# Altium PCB sEMG-20130713.PCBDOC
Units mil, origin at the board's own origin, x right, y up, seen from the top; angles counter-clockwise.
Board outline 6000 x 4000 mil, 4 copper layers (Top Layer, GND, POWER, Bottom Layer); 241 components, 116 nets, 607 pads, 173 vias.
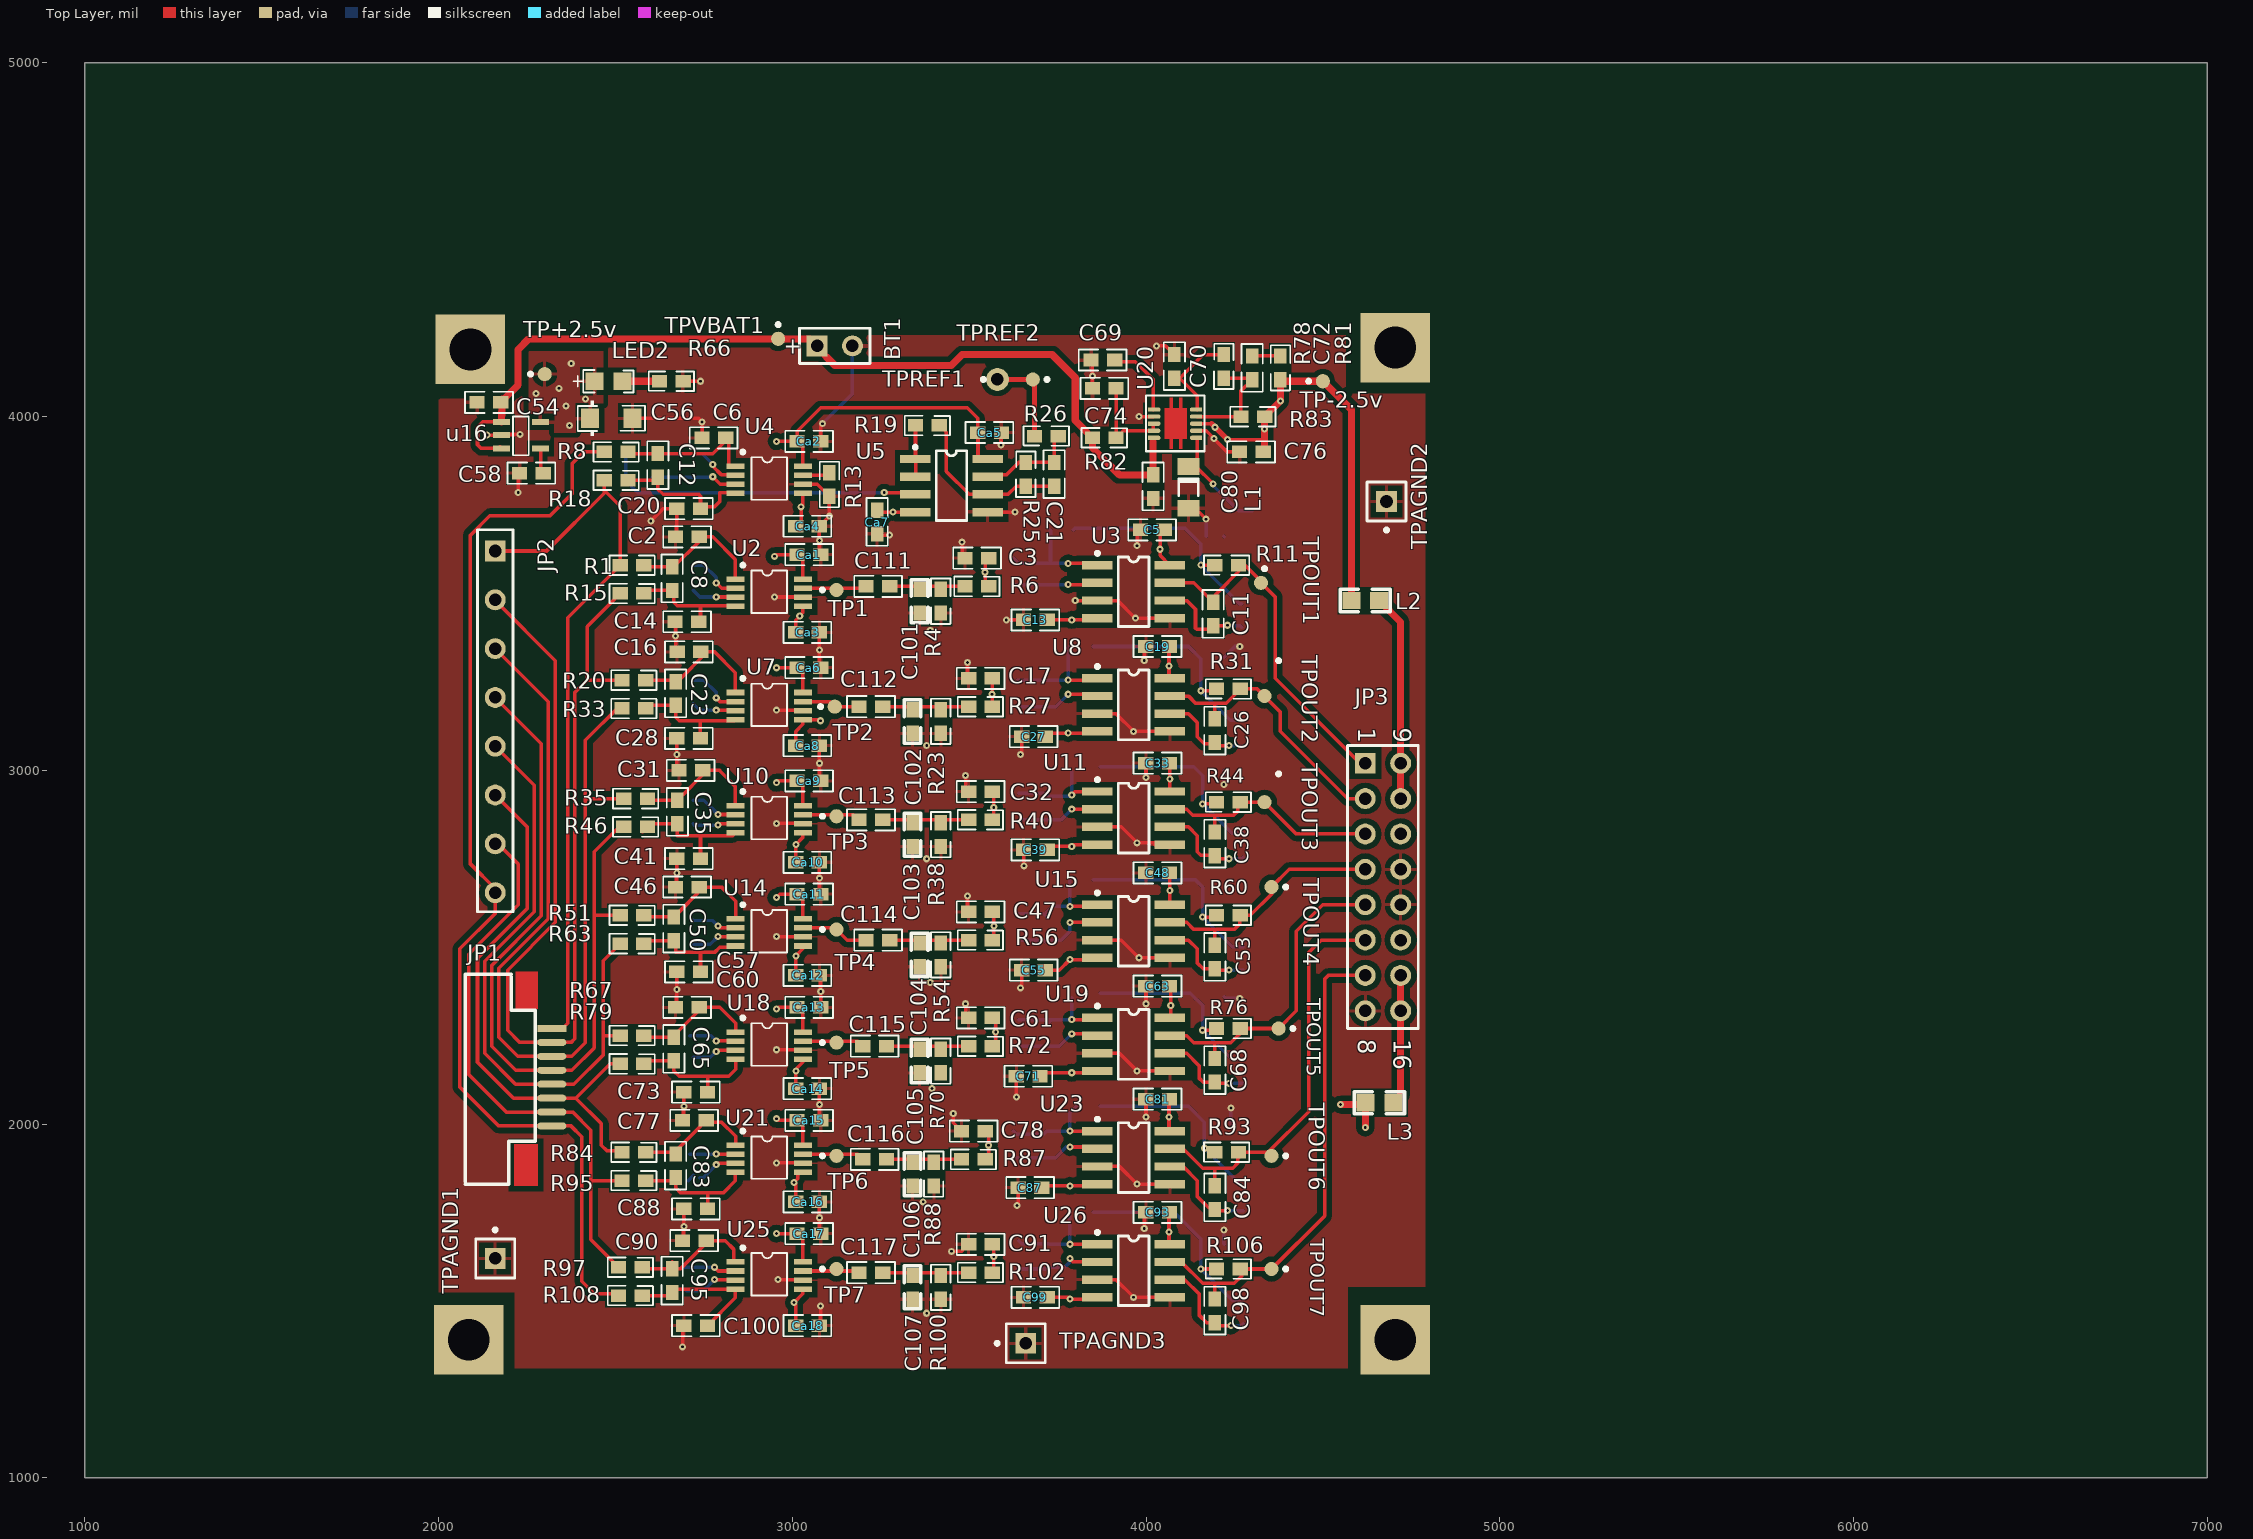
[diagram p0: Top Layer view]
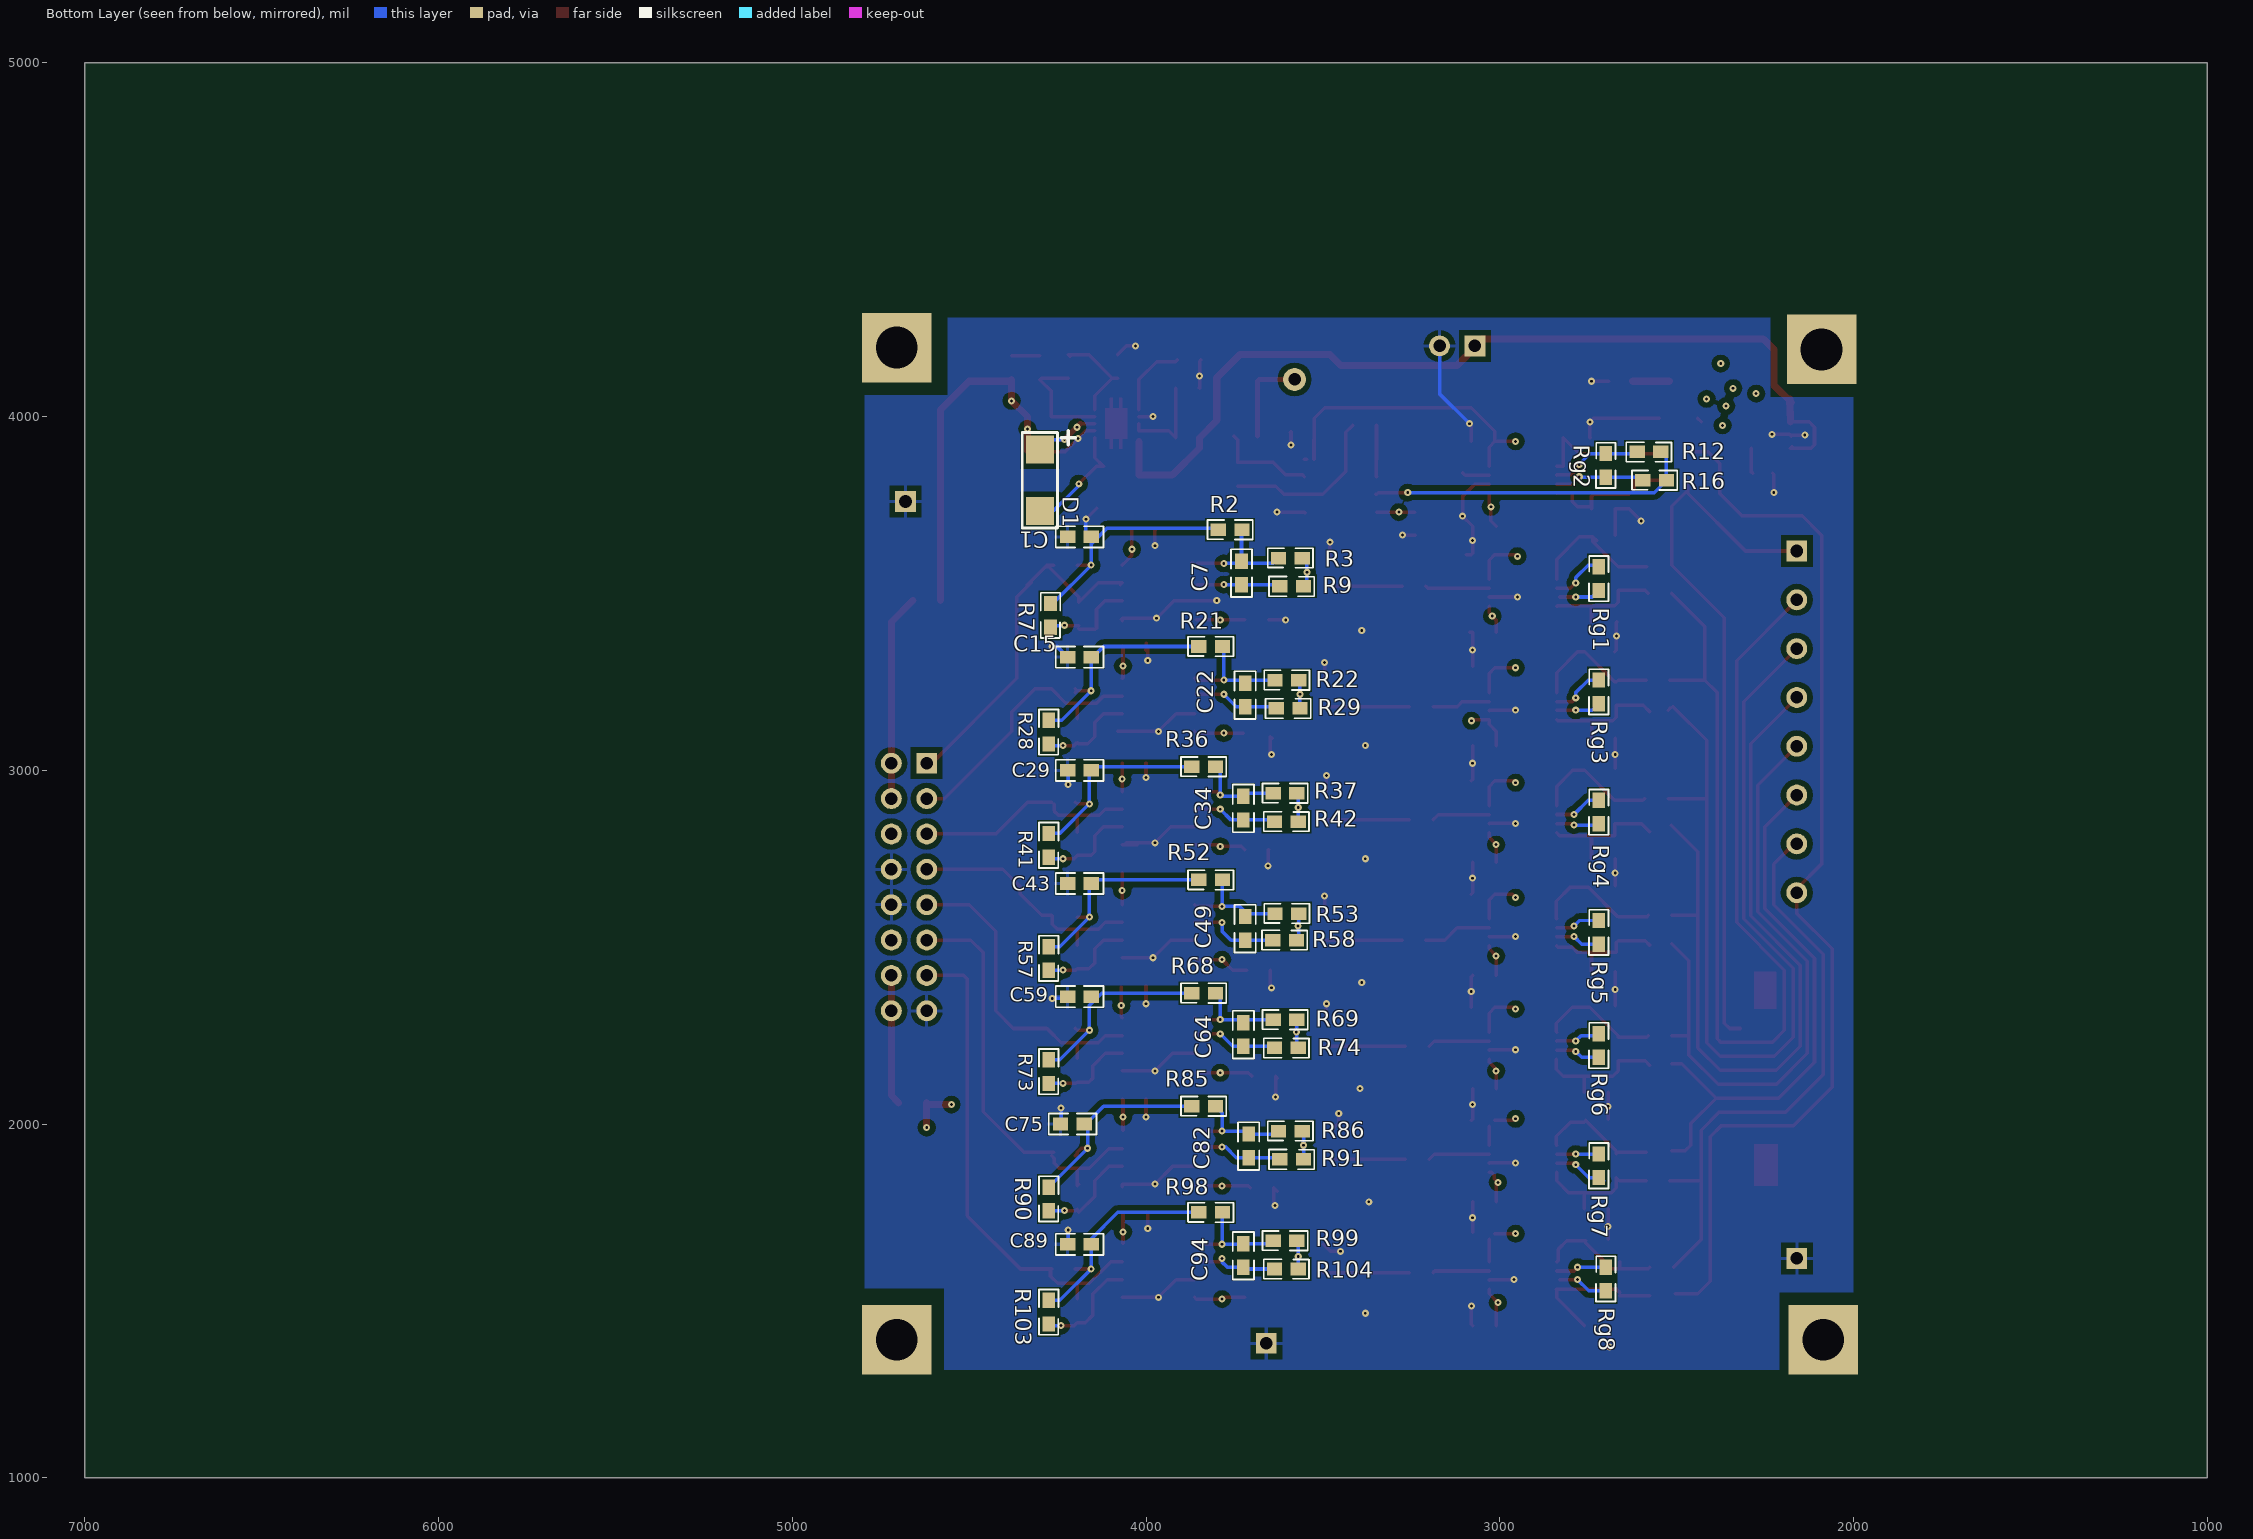
[diagram p1: Bottom Layer view, seen from below]
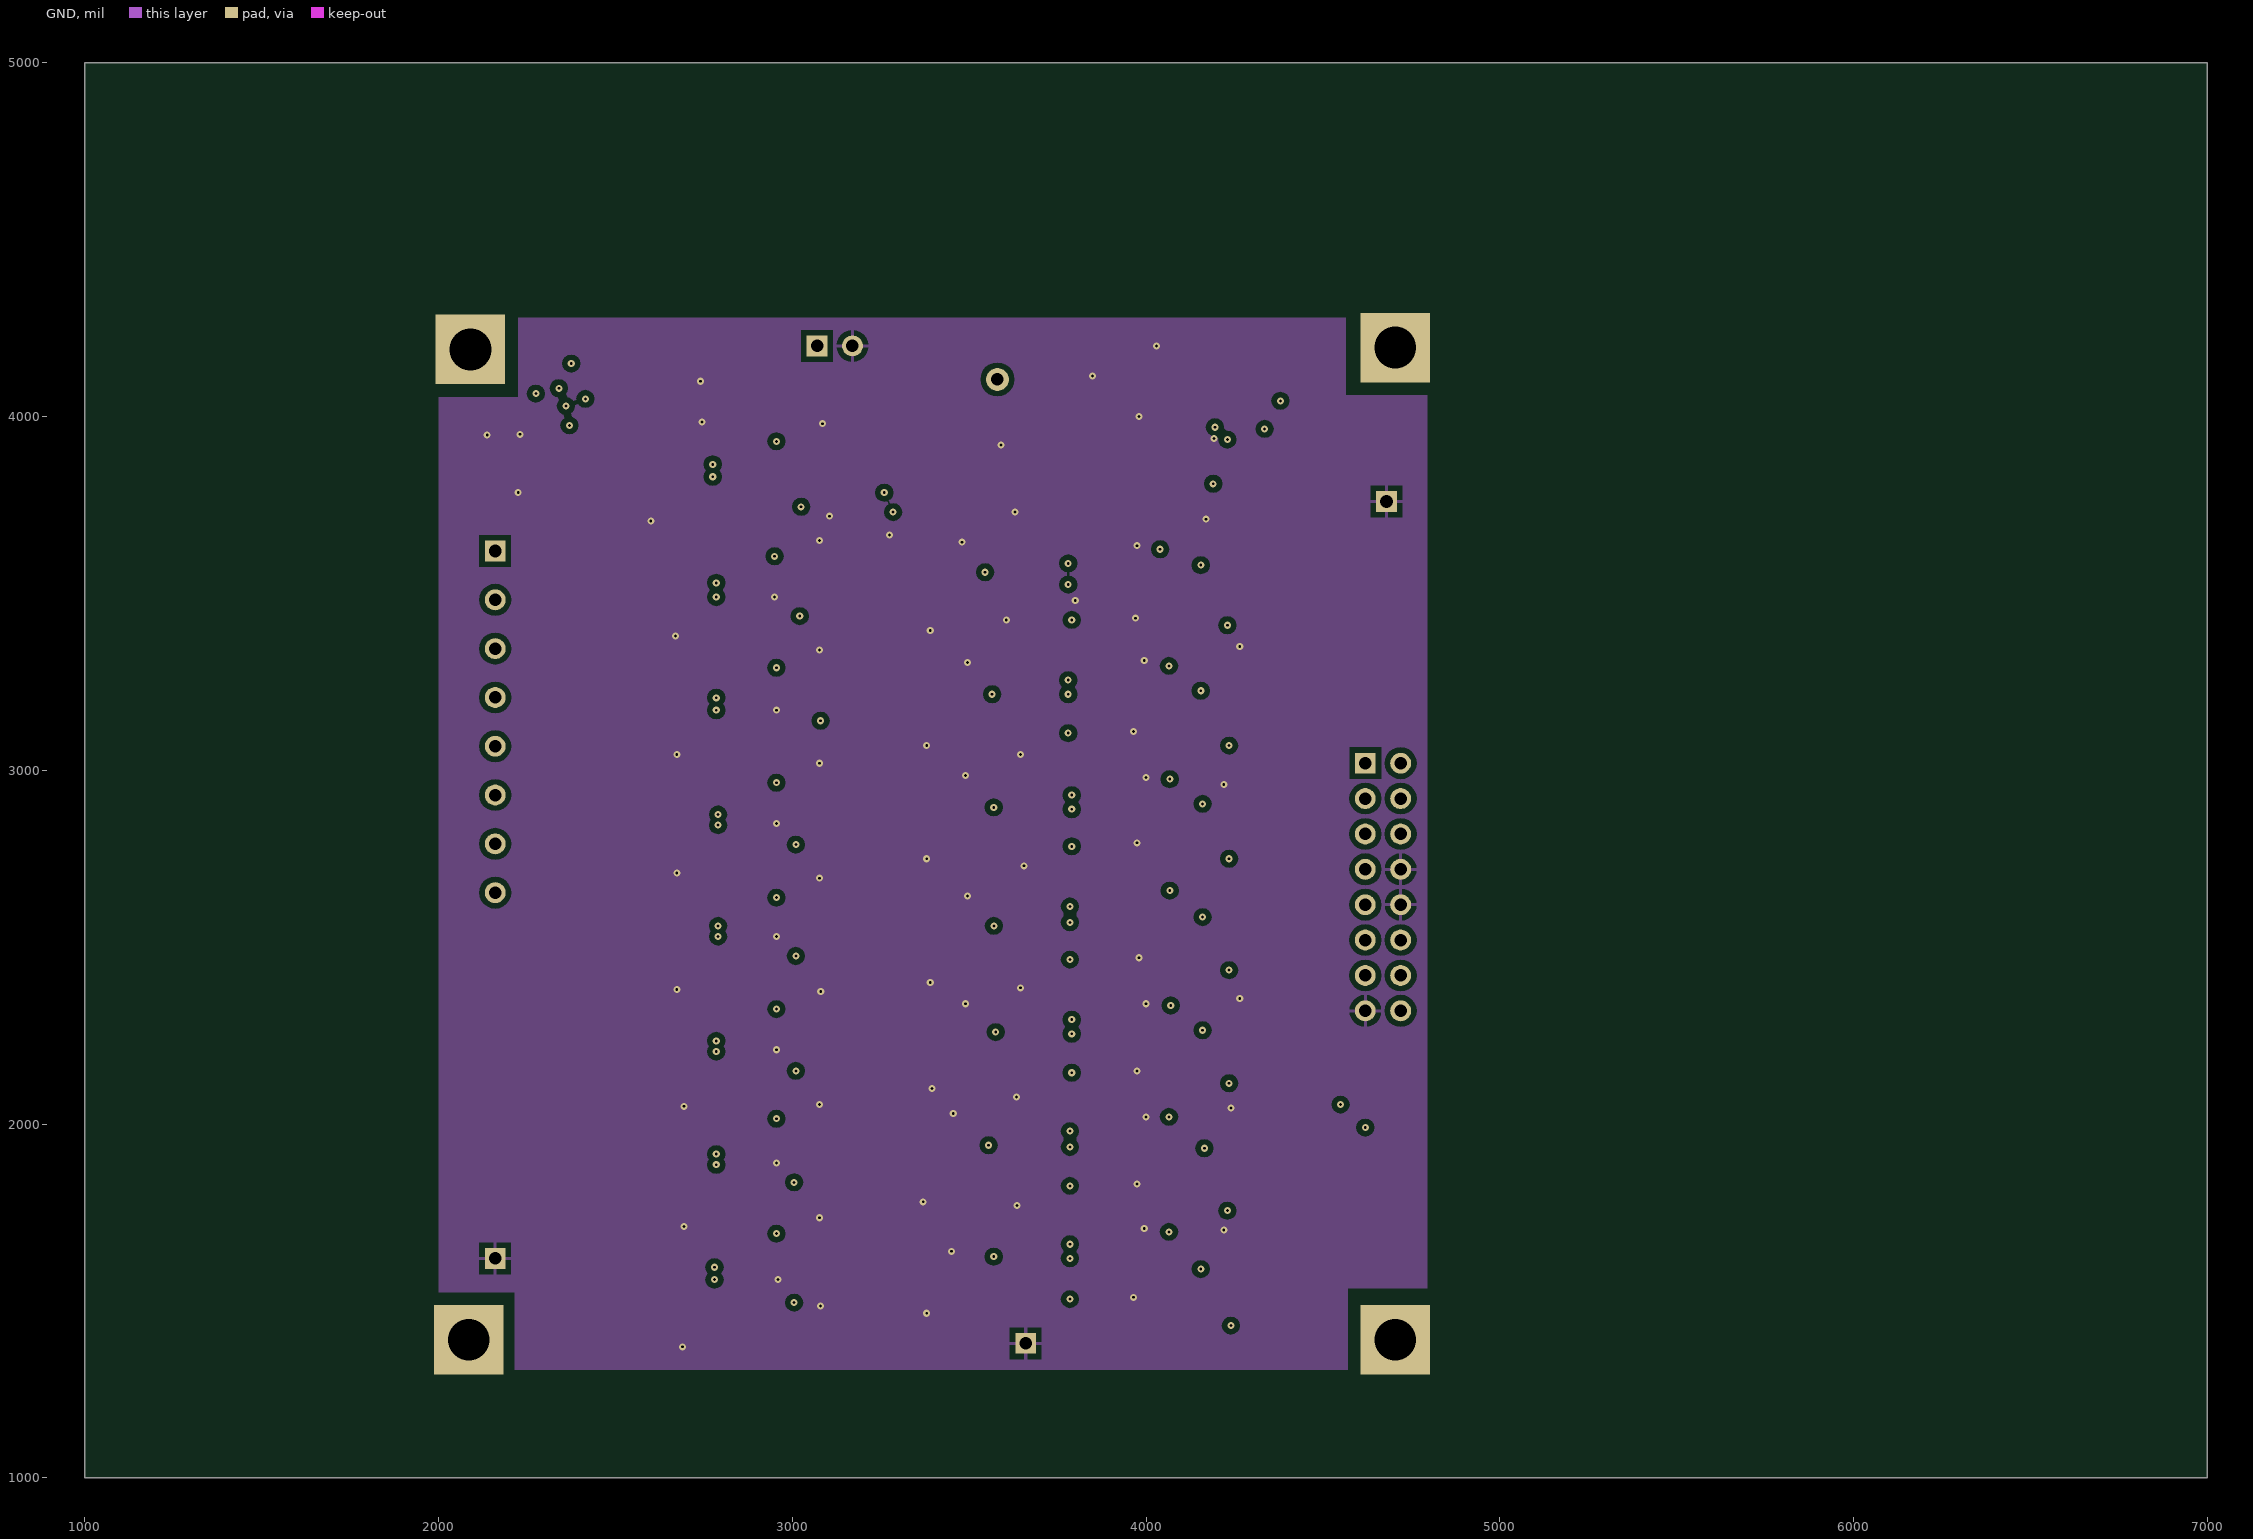
[diagram p2: GND]
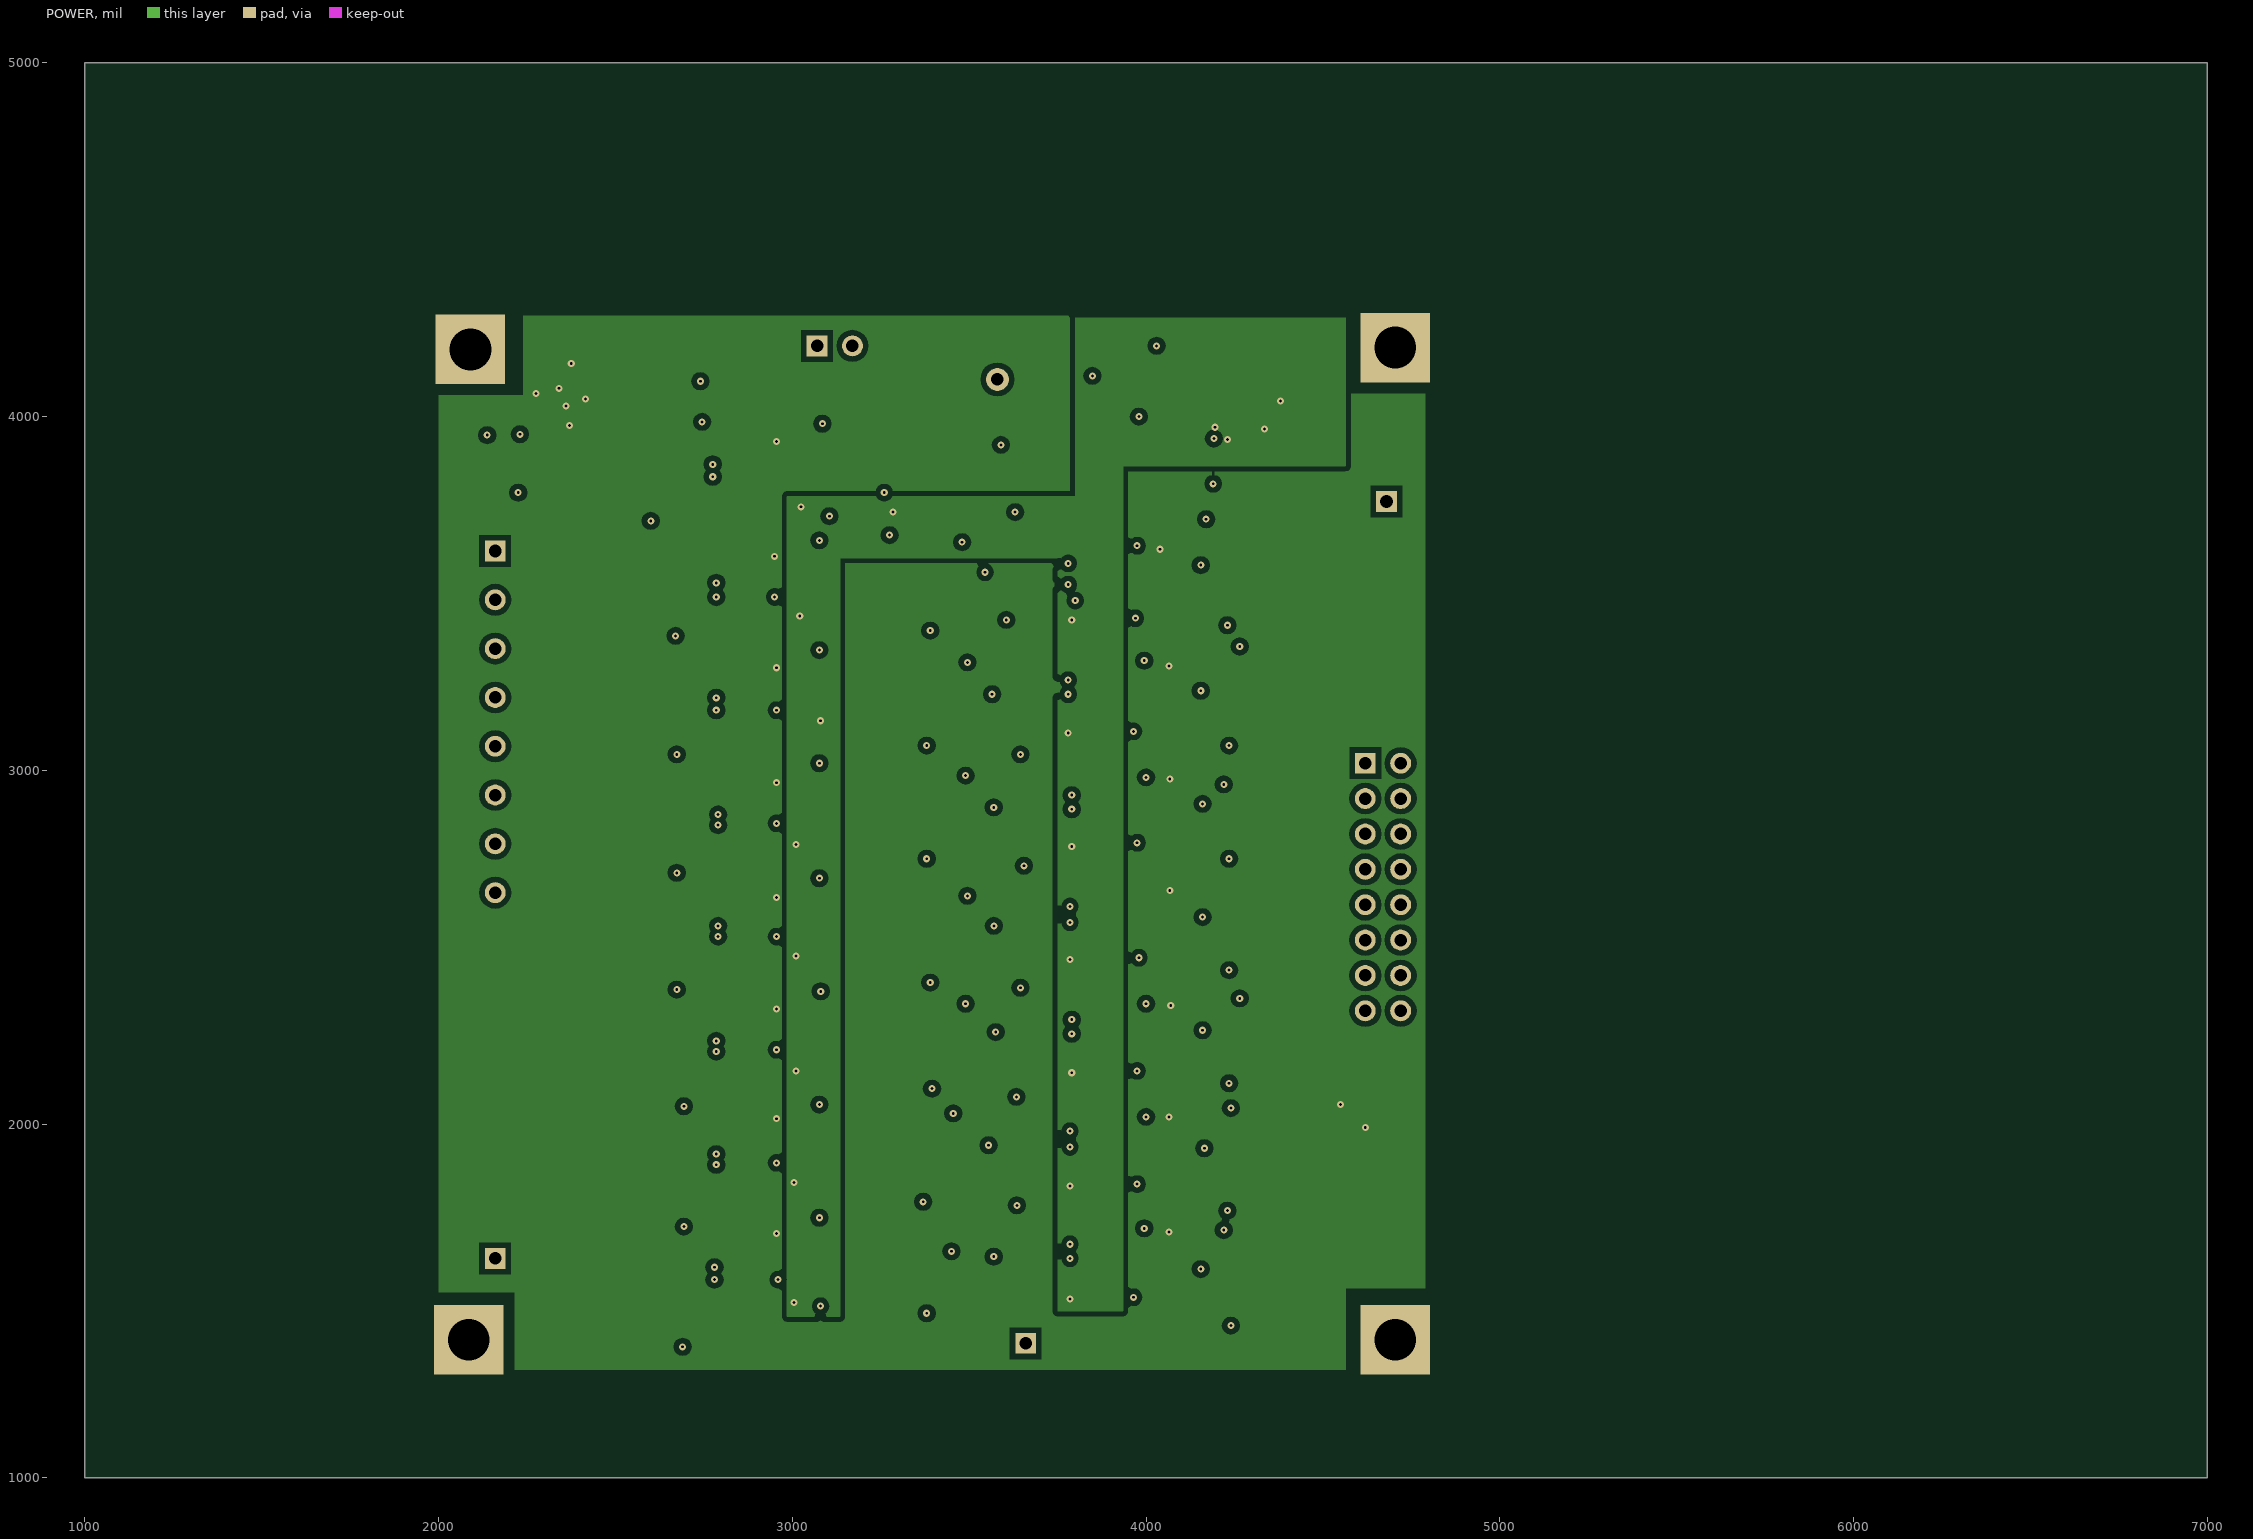
[diagram p3: POWER]

## Layer stack, top to bottom
Top Layer: signal copper 1.4
Dielectric: core 12.6, FR-4, Dk 4.8
GND: signal copper 1.4
Dielectric: prepreg 12.6, FR-4, Dk 4.8
POWER: signal copper 1.4
Dielectric: core 12.6, FR-4, Dk 4.8
Bottom Layer: signal copper 1.4

## Board outline
1000,1000 7000,1000 7000,5000 1000,5000

## Design rules (kind name [scope] priority, off if disabled: settings)
Clearance [All] p1: gap=7
ComponentClearance [All] p1: gap=10 collisioncheckmode=3 verticalgap=10
PolygonConnect [All] p1: connectstyle=Relief reliefconductorwidth=10 reliefentries=4 polygonreliefangle="90 Angle"
RoutingVias [All] p1: holewidth=28 width=50 viastyle="Through Hole" minholewidth=28 minwidth=50 maxholewidth=28 maxwidth=50
SolderMaskExpansion [All] p1: expansion=4
TestPointUsage [All] p1: valid=0 allowmultiple=FALSE
Testpoint [All] p1: side=15 testpointundercomponent=TRUE minsize=40 maxsize=100 preferedsize=60 minholesize=0 maxholesize=40 preferedholesize=32 testpointgrid=1 style=1021 order=0123456789
Width [All] p1: maxlimit=100 minlimit=7 preferedwidth=10 toplayer_prefwidth=20 midlayer1_minwidth=10 midlayer1_maxwidth=10 midlayer2_minwidth=10 midlayer2_maxwidth=10 minimp=50.000000 maximp=50.000000 favimp=50.000000
17 further rules are at their usual default settings.

## Components (designator, comment, footprint, x,y, rotation, side; value= is the part's Value field where it differs from the comment)
BT1 "Battery" BAT-2 3120,4200 r0 top
C1 "43uF" CAP0603 4090,3660 r0 bottom
C2 "2.2pF" CAP0603 2605,3660 r0 top
C3 "1.8uF" CAP0603 3620,3600 r180 top
C5 "0.1uF" CAP0603 3920,3680 r0 top
C6 "2.2pF" CAP0603 2680,3940 r0 top
C7 "100nF" CAP0603 3730,3460 r90 bottom
C8 "10pF" CAP0603 2660,3640 r270 top
C11 "100nF" CAP0603 4190,3540 r270 top
C12 "10pF" CAP0603 2620,3960 r270 top
C13 "0.1uF" CAP0603 3785,3425 r180 top
C14 "2.2pF" CAP0603 2800,3420 r180 top
C15 "43uF" CAP0603 4090,3320 r0 bottom
C16 "2.2pF" CAP0603 2610,3335 r0 top
C17 "1.8uF" CAP0603 3630,3260 r180 top
C19 "0.1uF" CAP0603 3935,3350 r0 top
C20 "2.2pF" CAP0603 2805,3740 r180 top
C21 "68pF" CAP0603 3740,3935 r270 top
C22 "100nF" CAP0603 3720,3115 r90 bottom
C23 "10pF" CAP0603 2670,3315 r270 top
C26 "100nF" CAP0603 4195,3210 r270 top
C27 "0.1uF" CAP0603 3780,3095 r180 top
C28 "2.2pF" CAP0603 2805,3090 r180 top
C29 "43uF" CAP0603 4090,3000 r0 bottom
C31 "2.2pF" CAP0603 2615,3000 r0 top
C32 "1.8uF" CAP0603 3630,2940 r180 top
C33 "0.1uF" CAP0603 3935,3020 r0 top
C34 "100nF" CAP0603 3725,2795 r90 bottom
C35 "10pF" CAP0603 2675,2980 r270 top
C38 "100nF" CAP0603 4195,2890 r270 top
C39 "0.1uF" CAP0603 3785,2775 r180 top
C41 "2.2pF" CAP0603 2805,2750 r180 top
C43 "43uF" CAP0603 4090,2680 r0 bottom
C46 "2.2pF" CAP0603 2605,2670 r0 top
C47 "1.8uF" CAP0603 3630,2600 r180 top
C48 "0.1uF" CAP0603 3935,2710 r0 top
C49 "100nF" CAP0603 3720,2455 r90 bottom
C50 "10pF" CAP0603 2665,2650 r270 top
C53 "100nF" CAP0603 4195,2570 r270 top
C54 "0.1uF" CAP0603 2240,4040 r180 top
C55 "0.1uF" CAP0603 3780,2435 r180 top
C56 "10uF" CAP-A 2500,4000 r180 top
C57 "2.2pF" CAP0603 2805,2430 r180 top
C58 "0.1uF" CAP0603 2360,3840 r180 top
C59 "43uF" CAP0603 4090,2360 r0 bottom
C60 "2.2pF" CAP0603 2605,2330 r0 top
C61 "1.8uF" CAP0603 3630,2300 r180 top
C63 "0.1uF" CAP0603 3935,2390 r0 top
C64 "100nF" CAP0603 3725,2155 r90 bottom
C65 "10pF" CAP0603 2665,2310 r270 top
C68 "100nF" CAP0603 4195,2250 r270 top
C69 "4.7nF" CAP0603 3780,4160 r0 top
C70 "0.22uF" CAP0603 4080,4240 r270 top
C71 "0.1uF" CAP0603 3765,2135 r180 top
C72 "10pF" CAP0603 4300,4040 r90 top
C73 "2.2pF" CAP0603 2825,2090 r180 top
C74 "0.1uF" CAP0603 3980,4080 r180 top
C75 "43uF" CAP0603 4110,2000 r0 bottom
C76 "22uF" CAP0603 4200,3900 r0 top
C77 "2.2pF" CAP0603 2625,2010 r0 top
C78 "1.8uF" CAP0603 3610,1980 r180 top
C80 "10uF" CAP0603 4020,3900 r270 top
C81 "0.1uF" CAP0603 3935,2070 r0 top
C82 "100nF" CAP0603 3710,1840 r90 bottom
C83 "10pF" CAP0603 2670,1980 r270 top
C84 "100nF" CAP0603 4195,1890 r270 top
C87 "0.1uF" CAP0603 3770,1820 r180 top
C88 "2.2pF" CAP0603 2825,1760 r180 top
C89 "43uF" CAP0603 4090,1660 r0 bottom
C90 "2.2pF" CAP0603 2625,1670 r0 top
C91 "1.8uF" CAP0603 3630,1660 r180 top
C93 "0.1uF" CAP0603 3935,1750 r0 top
C94 "100nF" CAP0603 3725,1530 r90 bottom
C95 "10pF" CAP0603 2660,1655 r270 top
C98 "100nF" CAP0603 4195,1570 r270 top
C99 "0.1uF" CAP0603 3785,1510 r180 top
C100 "2.2pF" CAP0603 2825,1430 r180 top
C101 "Cap" 0603 3360,3480 r90 top
C102 "Cap" 0603 3340,3140 r90 top
C103 "Cap" 0603 3340,2820 r90 top
C104 "Cap" 0603 3360,2480 r90 top
C105 "Cap" 0603 3360,2180 r90 top
C106 "Cap" 0603 3340,1860 r90 top
C107 "Cap" 0603 3340,1540 r90 top
C111 "2.2uF" CAP0603 3340,3520 r180 top
C112 "2.2uF" CAP0603 3320,3180 r180 top
C113 "2.2uF" CAP0603 3320,2860 r180 top
C114 "2.2uF" CAP0603 3340,2520 r180 top
C115 "2.2uF" CAP0603 3135,2220 r0 top
C116 "2.2uF" CAP0603 3135,1900 r0 top
C117 "2.2uF" CAP0603 3320,1580 r180 top
Ca1 "0.1uF" CAP0603 3145,3610 r180 top
Ca2 "0.1uF" CAP0603 3145,3930 r180 top
Ca3 "0.1uF" CAP0603 2945,3390 r0 top
Ca4 "0.1uF" CAP0603 2945,3690 r0 top
Ca5 "Cap" CAP0603 3460,3955 r0 top
Ca6 "0.1uF" CAP0603 3145,3290 r180 top
Ca7 "Cap" CAP0603 3240,3800 r270 top
Ca8 "0.1uF" CAP0603 2945,3070 r0 top
Ca9 "0.1uF" CAP0603 3145,2970 r180 top
Ca10 "0.1uF" CAP0603 2945,2740 r0 top
Ca11 "0.1uF" CAP0603 3145,2650 r180 top
Ca12 "0.1uF" CAP0603 2945,2420 r0 top
Ca13 "0.1uF" CAP0603 3145,2330 r180 top
Ca14 "0.1uF" CAP0603 2945,2100 r0 top
Ca15 "0.1uF" CAP0603 3145,2010 r180 top
Ca16 "0.1uF" CAP0603 2945,1780 r0 top
Ca17 "0.1uF" CAP0603 3145,1690 r180 top
Ca18 "0.1uF" CAP0603 2945,1430 r0 top
D1 "SL02（小信号肖特基二极管）" Diode_NOMAL 4300,3820 r270 bottom
JP1 "自制电极" 电极焊盘 2185,2130 r0 top
JP2 "已有电极" 接线端子1*8 2160,3120 r180 top
JP3 "" HDR2X8_CEN 4620,3020 r270 top
L1 "Inductor" INDC3216-1206 4120,3800 r270 top
L2 "bean" 0805 4620,3480 r180 top
L3 "bean" 0805 4660,2060 r180 top
LED2 "Green" LED0805 2480,4100 r180 top
R1 "Res2" RES0603 2545,3580 r180 top
R2 "Res2" RES0603 3760,3680 r180 bottom
R3 "Res2" RES0603 3590,3600 r180 bottom
R4 "Res2" RES0603 3420,3480 r90 top
R6 "Res2" RES0603 3520,3520 r180 top
R7 "Res2" RES0603 4270,3440 r90 bottom
R8 "Res2" RES0603 2500,3900 r180 top
R9 "Res2" RES0603 3590,3520 r0 bottom
R11 "Res2" RES0603 4230,3580 r0 top
R12 "Res2" RES0603 2580,3900 r0 bottom
R13 "Res2" RES0603 3105,3810 r90 top
R15 "Res2" RES0603 2545,3500 r180 top
R16 "Res2" RES0603 2560,3820 r180 bottom
R18 "Res2" RES0603 2500,3820 r180 top
R19 "Res2" RES0603 3380,3975 r180 top
R20 "Res2" RES0603 2550,3255 r180 top
R21 "Res2" RES0603 3815,3350 r180 bottom
R22 "Res2" RES0603 3600,3255 r180 bottom
R23 "Res2" RES0603 3420,3140 r90 top
R25 "Res2" RES0603 3660,3835 r270 top
R26 "Res2" RES0603 3720,3945 r0 top
R27 "Res2" RES0603 3530,3180 r180 top
R28 "Res2" RES0603 4275,3110 r90 bottom
R29 "Res2" RES0603 3600,3175 r0 bottom
R31 "Res2" RES0603 4235,3230 r0 top
R33 "Res2" RES0603 2550,3175 r180 top
R35 "Res2" RES0603 2555,2920 r180 top
R36 "Res2" RES0603 3835,3010 r180 bottom
R37 "Res2" RES0603 3605,2935 r180 bottom
R38 "Res2" RES0603 3420,2820 r90 top
R40 "Res2" RES0603 3530,2860 r180 top
R41 "Res2" RES0603 4275,2790 r90 bottom
R42 "Res2" RES0603 3605,2855 r0 bottom
R44 "Res2" RES0603 4235,2910 r0 top
R46 "Res2" RES0603 2555,2840 r180 top
R51 "Res2" RES0603 2545,2590 r180 top
R52 "Res2" RES0603 3815,2690 r180 bottom
R53 "Res2" RES0603 3600,2595 r180 bottom
R54 "Res2" RES0603 3420,2480 r90 top
R56 "Res2" RES0603 3530,2520 r180 top
R57 "Res2" RES0603 4275,2470 r90 bottom
R58 "Res2" RES0603 3610,2520 r0 bottom
R60 "Res2" RES0603 4235,2590 r0 top
R63 "Res2" RES0603 2545,2510 r180 top
R66 "Res2" RES0603 2660,4100 r0 top
R67 "Res2" RES0603 2545,2250 r180 top
R68 "Res2" RES0603 3835,2370 r180 bottom
R69 "Res2" RES0603 3605,2295 r180 bottom
R70 "Res2" RES0603 3420,2180 r90 top
R72 "Res2" RES0603 3530,2220 r180 top
R73 "Res2" RES0603 4275,2150 r90 bottom
R74 "Res2" RES0603 3605,2215 r0 bottom
R76 "Res2" RES0603 4235,2270 r0 top
R78 "Res2" RES0603 4220,4140 r270 top
R79 "Res2" RES0603 2545,2170 r180 top
R81 "Res2" RES0603 4380,4140 r90 top
R82 "Res2" RES0603 3880,3940 r180 top
R83 "Res2" RES0603 4300,4000 r180 top
R84 "Res2" RES0603 2550,1920 r180 top
R85 "Res2" RES0603 3835,2050 r180 bottom
R86 "Res2" RES0603 3590,1980 r180 bottom
R87 "Res2" RES0603 3510,1900 r180 top
R88 "Res2" RES0603 3400,1860 r90 top
R90 "Res2" RES0603 4275,1790 r90 bottom
R91 "Res2" RES0603 3590,1900 r0 bottom
R93 "Res2" RES0603 4230,1920 r0 top
R95 "Res2" RES0603 2550,1840 r180 top
R97 "Res2" RES0603 2540,1595 r180 top
R98 "Res2" RES0603 3815,1750 r180 bottom
R99 "Res2" RES0603 3605,1670 r180 bottom
R100 "Res2" RES0603 3420,1540 r90 top
R102 "Res2" RES0603 3530,1580 r180 top
R103 "Res2" RES0603 4275,1470 r90 bottom
R104 "Res2" RES0603 3605,1590 r0 bottom
R106 "Res2" RES0603 4235,1590 r0 top
R108 "Res2" RES0603 2540,1515 r180 top
Rg1 "Res2" RES0603 2720,3540 r270 bottom
Rg2 "Res2" RES0603 2700,3860 r270 bottom
Rg3 "Res2" RES0603 2720,3220 r270 bottom
Rg4 "Res2" RES0603 2720,2880 r270 bottom
Rg5 "Res2" RES0603 2720,2540 r270 bottom
Rg6 "Res2" RES0603 2720,2220 r270 bottom
Rg7 "Res2" RES0603 2720,1880 r270 bottom
Rg8 "Res2" RES0603 2700,1560 r270 bottom
TP1 "Component_1" TP0#1 3125,3510 r90 top
TP2 "Component_1" TP0#1 3120,3180 r90 top
TP3 "Component_1" TP0#1 3125,2870 r90 top
TP4 "Component_1" TP0#1 3125,2550 r90 top locked
TP5 "Component_1" TP0#1 3125,2230 r90 top
TP6 "Component_1" TP0#1 3125,1910 r90 top
TP7 "Component_1" TP0#1 3125,1590 r90 top
TP+2.5v "+2.5v" TP0#1 2300,4120 r90 top
TP-2.5v "-2.5v" TP0#1 4500,4100 r90 top
TPAGND1 "Component_1" PIN1 2160,1620 r0 top
TPAGND2 "Component_1" PIN1 4680,3760 r180 top
TPAGND3 "Component_1" PIN1 3660,1380 r90 top
TPOUT1 "Component_1" TP0#2 4335,3530 r0 top locked
TPOUT2 "Component_1" TP0#3 4335,3310 r270 top locked
TPOUT3 "Component_1" TP0#4 4335,2990 r270 top locked
TPOUT4 "Component_1" TP0#1 4355,2670 r270 top
TPOUT5 "Component_1" TP0#1 4375,2270 r270 top
TPOUT6 "Component_1" TP0#1 4355,1910 r270 top
TPOUT7 "Component_1" TP0#1 4355,1590 r270 top
TPREF1 "Component_1" 通孔测试点 3580,4105 r90 top
TPREF2 "Component_1" TP0#1 3680,4105 r270 top
TPVBAT1 "Component_1" TP1 2960,4220 r0 top
U2 "AD8220" MSOP-8 2945,3510 r270 top
U3 "OPA2365" SOIC-8#1 3965,3505 r270 top (schematic designator U9)
U4 "AD8220" MSOP-8 2945,3830 r270 top (schematic designator U1)
U5 "OP2177" SOIC-8#2 3410,4540 r270 top (schematic designator U23)
U7 "AD8220" MSOP-8 2945,3190 r270 top (schematic designator U3)
U8 "OPA2365" SOIC-8#1 3965,3185 r270 top (schematic designator U10)
U10 "AD8220" MSOP-8 2945,2870 r270 top (schematic designator U4)
U11 "OPA2365" SOIC-8#1 3965,2865 r270 top
U14 "AD8220" MSOP-8 2945,2550 r270 top (schematic designator U5)
U15 "OPA2365" SOIC-8#1 3965,2545 r270 top (schematic designator U12)
u16 "SPX3819_2.5v" SOT-23-G5 2225,3950 r0 top (schematic designator U25)
U18 "AD8220" MSOP-8 2945,2230 r270 top (schematic designator U6)
U19 "OPA2365" SOIC-8#1 3965,2225 r270 top (schematic designator U13)
U20 "tps63700" QFN10 4020,3940 r90 top
U21 "AD8220" MSOP-8 2945,1910 r270 top (schematic designator U7)
U23 "OPA2365" SOIC-8#1 3965,1905 r270 top (schematic designator U14)
U25 "AD8220" MSOP-8 2945,1580 r270 top (schematic designator U8)
U26 "OPA2365" SOIC-8#1 3965,1585 r270 top (schematic designator U15)

## Footprints (in the part's own frame and the unit in brackets; to place one, negate y for a bottom-side part, rotate by r counter-clockwise, add the part's x,y. Pads: shape width x height; smd on the part's side, far side on the other; paste and mask are expansions set on the pad)
0603 [mm]
  rect 1.1x0.9 smd: 1(-0.9,0) 2(0.8,0)
  silkscreen extent -1.6,-0.6 1.5,0.6
0805 [mm]
  rect 1.3x1.25 smd: 1(-1,0) 2(1,0)
  silkscreen extent -1.8,-0.8 1.8,0.8
BAT-2 [mm] "Multicell Battery; 2 Leads"
  rect 1.5x1.5 hole 0.9: 1(-1.27,0)
  round 1.5 hole 0.9: 2(1.27,0)
  silkscreen extent -2.54,-1.27 2.54,1.27
CAP0603 [mm]
  rect 1.1x0.9 smd: 1(1.64,0) 2(3.34,0)
  silkscreen extent 0.76,-0.76 4.19,0.76
CAP-A [mm]
  rect 1.3x1.4 smd: 1(1.814,0.127) 2(-1.234,0.127)
  silkscreen extent -2.12,-1.14 2.7,1.4
Diode_NOMAL [mm]
  rect 2x2 smd: 1(-2.2,-0.002) 2(2.2,-0.002)
  silkscreen extent -3.56,-1.27 3.43,2.54
HDR2X8_CEN [mm] "Connector; Header; 8x2 Position"
  rect 1.5x1.5 hole 0.9: 1(0,0)
  round 1.5 hole 0.9: 2(2.54,0) 3(5.08,0) 4(7.62,0) 5(10.16,0) 6(12.7,0) 7(15.24,0) 8(17.78,0) 9(0,2.54) 10(2.54,2.54) 11(5.08,2.54) 12(7.62,2.54) 13(10.16,2.54) 14(12.7,2.54) 15(15.24,2.54) 16(17.78,2.54)
  silkscreen extent -1.27,-1.27 19.05,3.81
INDC3216-1206 [mm] "3216 Chip; Chip Inductor; Body 3.2 x 1.6 mm (LxW typ)"
  rect 1.2x1.6 smd: 1(-1.5,0) 2(1.5,0)
  silkscreen extent -0.6,-0.7 0.6,0.7
LED0805 [mm]
  rect 1.3x1.25 smd: 1(1,0) 2(-1,0)
  silkscreen extent -1.8,-0.8 2.5,0.8
MSOP-8 [mm]
  rect 0.4x1.3 smd: 1(-0.762,-2.688) 2(-0.112,-2.688) 3(0.538,-2.688) 4(1.188,-2.688) 5(1.188,2.159) 6(0.538,2.159) 7(-0.112,2.159) 8(-0.762,2.159)
  silkscreen extent -1.9,-2.28 1.65,1.02
PIN1 [mm] "Connector; Plug"
  rect 1.5x1.5 hole 0.9: 1(0,0)
  silkscreen extent -1.4,-1.4 1.4,2.17
QFN10 [mil]
  round 11.98 smd mask+0: 1(80,-15) 2(60,-15) 3(40,-15) 4(20,-15) 5(0,-15) 6(0,-110) 7(20,-110) 8(40,-110) 9(60,-110) 10(80,-110)
  rect 12x28 smd mask+0: 1(80,0) 2(60,0) 3(40,0) 4(20,0) 5(0,0) 6(0,-125) 7(20,-125) 8(40,-125) 9(60,-125) 10(80,-125)
  Top Layer region: 78.5,-83 114,-83 114,-74 78.5,-74
  Top Layer region: -31.5,-83 5,-83 5,-74 -31.5,-74
  Top Layer region: -4,-96 84,-96 84,-32 -4,-32
  Top Layer region: 83,-56 114,-56 114,-47 83,-47
  Top Layer region: -31.5,-56 5,-56 5,-47 -31.5,-47
  silkscreen extent -38,-145 120,20
RES0603 [mm]
  rect 1.1x0.9 smd: 1(-0.9,0) 2(0.8,0)
  silkscreen extent -1.68,-0.7 1.58,0.7
SOIC-8#1 [mm]
  rect 0.6x2.2 smd: 1(-1.905,-2.6) 2(-0.635,-2.6) 3(0.635,-2.6) 4(1.905,-2.6) 5(1.905,2.6) 6(0.635,2.6) 7(-0.635,2.6) 8(-1.905,2.6)
  silkscreen extent -2.88,-2.72 2.5,1.1
SOIC-8#2 [mm]
  rect 0.6x2.2 smd: 1(16.764,-1.584) 2(18.034,-1.584) 3(19.304,-1.584) 4(20.574,-1.584) 5(20.574,3.616) 6(19.304,3.616) 7(18.034,3.616) 8(16.764,3.616)
  silkscreen extent 15.79,-1.71 21.17,2.12
SOT-23-G5 [mil]
  rect 47.24x16.9 smd: 1(-47,35) 2(-47,-2.4) 3(-47,-39.8) 4(63.24,-39.8) 5(63.24,35)
  silkscreen extent -15,-59 30,50
TP0#1 [mil]
  round 40 smd: 0(0,0)
  silkscreen extent -5,35 5,45
TP0#2 [mil]
  round 40 smd: 0(-10,0)
  silkscreen extent -5,35 5,45
TP0#3 [mil]
  round 40 smd: 0(100,0)
  silkscreen extent -5,35 5,45
TP0#4 [mil]
  round 40 smd: 0(80,0)
  silkscreen extent -5,35 5,45
TP1 [mil]
  round 40 smd: 1(0,0)
  silkscreen extent -5,35 5,45
接线端子1*8 [mm]
  rect 1.5x1.5 hole 0.9: 1(0,-12.7)
  round 1.5 hole 0.9: 2(0,-9.195) 3(0,-5.69) 4(0,-2.184) 5(0,1.321) 6(0,4.826) 7(0,8.331) 8(0,11.836)
  silkscreen extent -1.27,-14.22 1.27,13.21
电极焊盘 [mil]
  rect 82.11x19.68 smd: 1(135,140)
  oval 82.11x19.68 smd: 2(135,100.63) 3(135,61.26) 4(135,21.89) 5(135,-17.48) 6(135,-56.85) 7(135,-96.22) 8(135,-135.59)
  Top Layer region: 32.64,301.41 32.64,195.11 95.63,195.11 95.63,301.41
  Top Layer region: 28.74,-186.95 28.74,-305.06 95.67,-305.06 95.67,-186.95
  silkscreen extent -109,-301 88,294
通孔测试点 [mil]
  round 65 hole 35.44 unplated: 0(0,0)
  silkscreen extent -5,35 5,45

## Part data
BT1: "Multicell Battery"
C1 C2 C3 C5 C6 C7 C8 C11 C12 C13 C14 C15 C16 C17 C19 C20 C21 C22 C23 C26 C27 C28 C29 C31 C32 C33 C34 C35 C38 C39 C41 C43 C46 C47 C48 C49 C50 C53 C54 C55 C57 C58 C59 C60 C61 C63 C64 C65 C68 C69 C70 C71 C72 C73 C74 C75 C76 C77 C78 C80 C81 C82 C83 C84 C87 C88 C89 C90 C91 C93 C94 C95 C98 C99 C100 C111 C112 C113 C114 C115 C116 C117 Ca1 Ca2 Ca3 Ca4 Ca6 Ca8 Ca9 Ca10 Ca11 Ca12 Ca13 Ca14 Ca15 Ca16 Ca17 Ca18: library part CAP
C56: library part "CAP POL3"
C101 C102 C103 C104 C105 C106 C107 Ca5 Ca7: "Capacitor"
D1: library part Diode, "Default Diode"
JP1 JP2: library part "Header 8", "Header, 8-Pin"
JP3: library part "Header 8X2A", "Header, 8-Pin, Dual row"
L2 L3: library part Res2, "Resistor"
LED2: library part LED
R1 R2 R3 R4 R6 R7 R8 R9 R11 R12 R13 R15 R16 R18 R19 R20 R21 R22 R23 R25 R26 R27 R28 R29 R31 R33 R35 R36 R37 R38 R40 R41 R42 R44 R46 R51 R52 R53 R54 R56 R57 R58 R60 R63 R66 R67 R68 R69 R70 R72 R73 R74 R76 R78 R79 R81 R82 R83 R84 R85 R86 R87 R88 R90 R91 R93 R95 R97 R98 R99 R100 R102 R103 R104 R106 R108 Rg1 Rg2 Rg3 Rg4 Rg5 Rg6 Rg7 Rg8: "Resistor"
TP+2.5v TP-2.5v U2 U4 U7 U10 U14 U18 U20 U21 U25: library part Component_1
u16: library part SPX3819

## Free pads (board coordinates)
  rect 196.85x196.85 hole 118.11: 0(4705,4195) 1(2090,4190) 2(2085,1390) 3(4705,1390)

## Via types
v1: diameter 20, hole 8, Top Layer to Bottom Layer, 173 vias

## Nets (pads, with @x,y where several pads share a name; then routed paths per layer and width w, separated by ;. In a path a pad name is that pad's centre, name@x,y a point inside that pad or via, vN(x,y) a via of type N, cw(c..) or ccw(c..) an arc to the next point about the centre after c; other vN are vias at no path point)
+2.5V: C5.2 C19.2 C33.2 C48.2 C56.1 C63.2 C81.2 C93.2 Ca1.2 Ca2.2 Ca5.1 Ca6.2 Ca9.2 Ca11.2 Ca13.2 Ca15.2 Ca17.2 L3.2 LED2.1 TP+2.5v.0 U2.8 U3.8 U4.8 U5.8 U7.8 U8.8 U10.8 U11.8 U14.8 U15.8 u16.5 U18.8 U19.8 U21.8 U23.8 U25.8 U26.8 | length 2558.6
  Top Layer w10: C56.1@2430,3985 C56.1@2440.63,3995.63 ; v1(2950,3605) 2955,3610 Ca1.2 3030,3593.5 U2.8 ; v1(2955,1690) Ca17.2 ; v1(2955,2015) 2960,2010 Ca15.2 ; v1(2955,2325) 2960,2330 Ca13.2 3030,2313.5 U18.8 ; v1(2955,2640) 2965,2650 Ca11.2 3030,2633.5 U14.8 ; v1(2955,2965) 2960,2970 Ca9.2 3030,2953.5 U10.8 ; v1(2955,3290) Ca6.2 3030,3273.5 U7.8 ; v1(2955,3930) Ca2.2 ; U25.8 Ca17.2@3030,1673.5 ; U21.8 Ca15.2@3030,1993.5 ; U4.8 3030,3913.5 Ca2.2 ; U5.8@3525,3880 3524.57,3995.43 3495,4025 3080,4025 3013.5,3958.5 Ca2.2 ; U5.8@3545,3880 U5.8 ; C5.2@4041.5,3680 4040,3678.5 4040,3607.36 U3.8 ; U26.8@4065,1662.36 v1(4065,1695) C93.2@4065,1748.5 ; U23.8@4065,1982.36 v1(4065,2020) 4065,2068.5 C81.2 ; U3.8@4065,3582.36 U3.8 ; C48.2 4067.36,2709.13 U15.8 ; C33.2 4067.36,3019.13 U11.8 ; U8.8@4066.5,3260.87 U8.8 4065,3262.36 v1(4065,3295) 4065,3348.5 C19.2 ; U3.8@4066.5,3580.87 U3.8 ; U19.8 4070,2302.64 v1(4070,2335) C63.2@4070,2386.5
  Top Layer w20: v1(4550,2055) L3.2@4615.63,2055 ; v1(4620,1990) 4620,2059.37 L3.2
  other v1: 4067.36,2660 4067.36,2975 4040,3625 2370,3975 2360,4030 2415,4050 2275,4065 2340,4080 2375,4150
-2.5V: C13.1 C27.1 C39.1 C55.1 C71.1 C76.2 C87.1 C99.1 Ca3.1 Ca4.1 Ca7.1 Ca8.1 Ca10.1 Ca12.1 Ca14.1 Ca16.1 Ca18.1 D1.1 L2.2 R81.1 R83.1 TP-2.5v.0 U2.5 U3.4 U4.5 U5.4 U7.5 U8.4 U10.5 U11.4 U14.5 U15.4 U18.5 U19.4 U20.8 U21.5 U23.4 U25.5 U26.4 | length 3474
  Top Layer w10: v1(3005,1495) 3030,1520 U25.5 ; Ca18.1 v1@3009.57,1490.43 ; Ca16.1 3009.57,1830.43 v1(3005,1835) 3015,1845 3015,1855 3023.23,1863.23 U21.5 ; Ca14.1 3010,2100.43 3010,2155 3030,2175 U18.5 ; Ca12.1 3010,2420.43 v1(3010,2475) 3030,2495 U14.5 ; Ca10.1 3010,2740.43 v1(3010,2790) 3030,2810 U10.5 ; Ca8.1 3009.57,3109.57 3030,3130 U7.5 3076.77,3143.23 v1(3080,3140) ; Ca3.1 3009.57,3424.57 3030,3445 U2.5 ; Ca4.1 3025,3705.43 v1(3025,3745) 3030,3750 U4.5 ; Ca7.1@3240.43,3730 3335,3730 U5.4 ; C71.1 3710.43,2145 v1(3790,2145) U19.4@3857.64,2145 ; C87.1 3710.43,1825 v1(3785,1825) U23.4@3857.64,1825 ; C55.1 3755,2435 v1(3785,2465) 3857.64,2465 U15.4 ; C99.1 3780,1510 v1(3785,1505) 3857.64,1505 U26.4 ; C39.1 3730.43,2785 v1(3790,2785) 3795,2790 U11.4 ; C13.1 v1(3790,3425) U3.4@3857.64,3425 ; C27.1@3725.43,3105 v1(3780,3105) 3857.64,3105 U8.4 ; U20.8@4145,3980 4185,3980 ; v1(4230,3935) 4335.43,3935 ; C76.2 4335.43,3903.94 R83.1 v1(4380,4044.57) R81.1 4380.43,4105 4415,4105
  Top Layer w15: 4185,3980 v1(4230,3935)
  Top Layer w20: C76.2@4335.43,3903.94 R83.1 v1(4380,4044.57) R81.1 4384.57,4100 TP-2.5v.0 4580.63,4019.37 L2.2
  Bottom Layer w10: v1(4230,3935) D1.1@4285,3935
  other v1: 3010,2150 3021,3436 3285,3730 4335.43,3965 4195,3970
AGND: BT1.2 C1.2 C2.1 C3.2 C5.1 C6.1 C13.2 C14.2 C15.2 C16.1 C17.2 C19.1 C20.2 C27.2 C28.2 C29.2 C31.1 C32.2 C33.1 C39.2 C41.2 C43.2 C46.1 C47.2 C48.1 C54.2 C55.2 C56.2 C57.2 C58.2 C59.2 C60.1 C61.2 C63.1 C69.1 C70.1 C71.2 C73.2 C74.2 C75.2 C76.1 C77.1 C78.2 C80.2 C81.1 C87.2 C88.2 C89.2 C90.1 C91.2 C93.1 C99.2 C100.2 C101.1 C102.1 C103.1 C104.1 C105.1 C106.1 C107.1 Ca1.1 Ca2.1 Ca3.2 Ca4.2 Ca5.2 Ca6.1 Ca7.2 Ca8.2 Ca9.1 Ca10.2 Ca11.1 Ca12.2 Ca13.1 Ca14.2 Ca15.1 Ca16.2 Ca17.1 Ca18.2 JP3.8 JP3.12 JP3.13 L1.2 R4.1 R13.1 R23.1 R38.1 R54.1 R66.2 R88.1 R100.1 TPAGND1.1 TPAGND2.1 TPAGND3.1 U2.6 U3.3 U3.5 U4.6 U5.5 U7.6 U8.3 U8.5 U10.6 U11.3 U11.5 U14.6 U15.3 U15.5 u16.2 U18.6 U19.3 U19.5 U20.2 U20.7 U21.6 U23.3 U23.5 U25.6 U26.3 U26.5 | length 6392.1
  Top Layer w10: v1(2137.4,3947.6) u16.2 ; u16.2@2175.4,3945 2180.4,3950 v1(2230,3950) ; v1(2225,3785) 2225,3836.5 C58.2 ; C56.2 2735,3995 v1(2745,3985) 2745,3940.43 C6.1 ; v1(2600,3705) 2635,3740 C20.2 C2.1@2673.5,3663.94 ; C14.2 2670,3418.5 2670,3339.57 C16.1 ; C60.1@2673.5,2333.94 C57.2 ; C46.1@2673.5,2673.94 C41.2 ; C31.1@2673.5,3006.06 C28.2 ; v1(2690,1370) 2690,1426.5 C100.2 ; R66.2 v1(2740,4100) ; C90.1@2693.5,1673.94 C88.2 ; C77.1@2693.5,2013.94 C73.2 ; v1(2950,3490) 3028.82,3490 U2.6 ; v1(2955,1890) 3028.82,1890 U21.6 ; v1(2955,2210) 3028.82,2210 U18.6 ; v1(2955,2530) 3028.82,2530 U14.6 ; v1(2955,2850) 3028.82,2850 U10.6 ; v1(2955,3170) 3028.82,3170 U7.6 ; v1(2960,1560) 3028.82,1560 U25.6 ; U4.6 3070.75,3808.82 R13.1 v1(3105,3718.5) Ca4.2 3076.5,3613.94 Ca1.1 Ca1.1@3095,3610 ; Ca18.2 3080,1433.5 v1(3080,1485) ; Ca17.1@3076.5,1693.94 Ca16.2 ; Ca14.2 3076.5,2013.94 Ca15.1 ; Ca12.2 3080.43,2416.06 Ca13.1 ; Ca10.2 3076.5,2653.94 Ca11.1 ; Ca8.2 3076.5,2973.94 Ca9.1 ; Ca6.1@3076.5,3293.94 Ca3.2 Ca3.2@3085,3390 ; Ca2.1 3080.43,3975.43 v1(3085,3980) ; Ca7.2@3238.5,3665 v1(3275,3665) ; v1(3450,1640) 3478.5,1640 C91.2 ; v1(3455,2030) 3455,2003.5 C78.2 ; C3.2@3478.5,3600 3480,3601.5 v1(3480,3645) ; C61.2@3490,2305 v1(3490,2340) ; C32.2@3490,2940 v1(3490,2985) ; v1(3495,2645) 3495,2603.5 C47.2 ; v1(3495,3305) 3495,3263.5 C17.2 ; U5.5@3550,3727.64 U5.5 v1(3630,3730) ; v1(3590,3920) 3590,3953.5 Ca5.2 Ca5.2@3590,3956.5 ; v1(3605,3425) C13.2 ; C87.2@3628.5,1810 C87.2 v1@3638.5,1773.5 ; C71.2@3628.5,2130 C71.2 v1(3633.5,2076.5) ; C27.2@3643.5,3090 C27.2 3648.5,3048.5 v1(3645,3045) ; v1@3648.5,2388.5 C55.2 ; C39.2 3655,2773.5 v1(3655,2730) ; v1(3800,3480) 3920,3480 v1(3970,3430) U3.5 ; C69.1@3845,4160.43 C69.1 3848.5,4156.06 C74.2 C74.2@3850,4081.5 ; U15.3@3860,2520 3930,2520 v1(3980,2470) U15.5 ; U26.3 3915,1560 v1(3965,1510) U26.5 ; U23.3 3925,1880 v1(3975,1830) U23.5 U23.5@4067.36,1822.64 ; U19.3 3925,2200 v1(3975,2150) U19.5 ; U11.3 3930,2840 v1(3975,2795) 4055,2795 U11.5@4060,2790 ; U8.3 3915,3160 v1(3965,3110) U8.5@4080,3110 ; C5.1@3974.57,3680 3975,3679.57 v1(3975,3635) ; v1(3980,4000) U20.2@4020,4000 ; v1(3995,1705) 3995,1745.43 C93.1 ; v1(3995,3310) 3995,3345.43 C19.1 ; C81.1 4000,2069.57 v1(4000,2020) ; C63.1 4000,2389.57 v1(4000,2340) ; C19.1@3999.57,3359.57 3999.57,3340 C19.1@4000,3340.43 ; v1(4000,2980) 4000,3019.57 C33.1 C33.1@4000,3020.43 ; U11.5@4025,2790 U11.5 ; v1(4030,4200) 4055,4200 4079.57,4175.43 C70.1 ; U3.5@4067.36,3422.64 U3.5 ; U3.5@4070,3427.36 U3.5 ; L1.2@4139.06,3740.94 v1(4170,3710) ; U20.7@4145,3960 4170,3960 4230,3900 C76.1
  Bottom Layer w10: v1(3085,3980) 3170,4065 BT1.2 ; 4170,3661.5 v1(4170,3710) ; v1(4220,1700) 4220,1661.5 C89.2 ; v1(4220,2960) 4220,2998.5 C29.2 ; C1.2@4220,3661.5 C1.2 ; C59.2 4226.5,2355 v1(4265,2355) ; C15.2 4251.5,3350 v1(4265,3350) ; v1(4240,2045) 4240,2001.5 C75.2
  other v1: 3380,1465 2693.5,1710 3076.5,1735 3635,1770 3370,1780 2693.5,2050 3076.5,2055 3395,2100 3080.43,2375 2673.5,2380 3645,2385 3390,2400 3076.5,2695 2673.5,2710 3380,2750 3076.5,3020 2673.5,3045 3380,3070 3076.5,3340 2670,3380 3390,3395 3076.5,3650 4192.02,3937.98 3848.5,4115
J1: JP1.1 JP2.1 R1.2 R18.2 | length 2050.6
  Top Layer w10: JP2.1 2305,3620 2468.5,3783.5 R18.2 ; JP1.1 2350,2270 2365,2285 2365,3431.5 R1.2 2513.5,3746.5 2468.5,3791.5
J2: JP1.2 JP2.2 R15.2 R20.2 | length 2962.4
  Top Layer w10: JP2.2 2160,3480 2330,3310 2330,2570 2195,2435 2195,2265 2229.37,2230.63 2374.37,2230.63 2385,2241.26 2385,3220 2420,3255 ; R15.2 2420,3406.5 2420,3255 ; R20.2 2420,3255
J3: JP1.3 JP2.3 R33.2 R35.2 | length 2618.4
  Top Layer w10: JP2.3@2171,3344 JP2.3 2310,3194 2310,2580 2170,2440 2170,2245 2223.74,2191.26 2376.26,2191.26 2415,2230 2415,3085 R33.2@2510,3180 ; 2415,2920 R35.2 ; R33.2 R33.2@2523.5,3170
J4: JP1.4 JP2.4 R46.2 R51.2 | length 2176.8
  Top Layer w10: JP2.4 2160,3205 2290,3075 2290,2588.28 2150,2448.28 2150,2220 2218.11,2151.89 2376.89,2151.89 2440,2215 2440,2770 R46.2@2515,2845 ; 2440,2590 R51.2
J5: JP1.5 JP2.5 R63.2 R67.2 | length 1762.5
  Top Layer w10: JP2.5@2162,3068 JP2.5 2270,2958 2270,2600 2130,2460 2130,2200 2217.48,2112.52 2382.52,2112.52 2465,2195 2465,2461.5 R63.2 ; 2465,2250 R67.2
J6: JP1.6 JP2.6 R79.2 R84.2 | length 1558.7
  Top Layer w10: JP2.6 2250,2840 2250,2608.28 2110,2468.28 2110,2175 2211.85,2073.15 2388.15,2073.15 ; R84.2@2513.5,1925 2475,1925 2460,1940 2460,2001.3 2388.15,2073.15 ; R79.2 2485,2170 2388.15,2073.15
J7: JP1.7 JP2.7 R95.2 R97.2 | length 1663.7
  Top Layer w10: JP2.7@2160,2800 2225,2735 2225,2620 2085,2480 2085,2140 2191.22,2033.78 2378.78,2033.78 2430,1982.56 2430,1673.5 R97.2 ; 2430,1840 R95.2
J8: JP1.8 JP2.8 R8.2 R108.2 | length 3081.7
  Top Layer w10: R8.2 2410,3900 2377.5,3867.5 2377.5,3782.5 2315,3720 2145,3720 2090,3665 2090,2735 2160,2665 2160,2595 2060,2495 2060,2104.41 2170,1994.41 2374.41,1994.41 2405,1963.82 2405,1555 2440,1520 R108.2@2503.5,1520
NetC1_1: C1.1 R2.1 R7.2 R11.1 | length 640.2
  Top Layer w10: v1(4155,3580) R11.1
  Bottom Layer w10: R2.1@3795,3680 R2.1 3800.43,3685 4110,3685 4155,3640 v1(4155,3580) 4263.5,3471.5 R7.2
NetC2_2: C2.2 C8.1 R1.1 U2.1 | length 421.3
  Top Layer w10: R1.1@2585,3575.43 2665,3575.43 2736.5,3646.93 C2.2 ; C2.2@2725,3648.5 C2.2 ; 2839.18,3565.82 U2.1 2839.18,3595.82 2775,3660 C2.2
NetC3_1: C3.1 R3.2 R6.1 R9.1 | length 150
  Top Layer w10: R6.1@3545.43,3520 C3.1@3545.43,3600
  Bottom Layer w10: R9.1@3545,3525 R3.2@3545,3595
  other v1: 3545,3560
NetC6_2: C6.2 C12.1 R8.1 U4.1 | length 397.6
  Top Layer w10: R8.1@2540,3895.43 2775.43,3895.43 2810,3930 2820,3940 2820,3860 U4.1
NetC7_1: C7.1 R9.2 U3.2 | length 235.6
  Top Layer w10: v1(3780,3525) U3.2@3855,3525
  Bottom Layer w10: R9.2 3626.5,3525 v1(3780,3525)
NetC7_2: C7.2 R2.2 R3.1 U3.1 | length 345.7
  Top Layer w10: v1(3780,3585) U3.1@3855,3585 ; U3.1@3857.64,3575 U3.1 ; U3.1@3865,3582.36 U3.1 ; U3.1@3870,3587.36 U3.1
  Bottom Layer w10: R3.1 3640.43,3585 v1(3780,3585) ; R2.2 3730,3678.5 C7.2
NetC8_2: C8.2 C14.1 R15.1 U2.4 | length 376
  Top Layer w10: R15.1 2588.94,3508.5 C8.2@2665,3508.5 ; C8.2@2665,3495.43 C8.2@2665,3508.5 ; C14.1@2735,3430 2735,3425.43 C14.1@2740.43,3420 ; C14.1@2740.43,3425.43 C14.1@2740.43,3420 ; 2740.43,3464.57 C14.1@2740.43,3420 ; U2.4 2837.41,3465 2740,3465 2675,3465 2665,3475 C8.2@2665,3508.5
NetC11_2: C11.2 R7.1 U3.6 | length 311.6
  Top Layer w10: U3.6@4107.16,3480 U3.6 4115,3480 4140,3455 4140,3402.01 4143.5,3398.5 4188.5,3398.5 C11.2@4190,3400 ; C11.2 4228.5,3408.5 v1(4230,3410)
  Bottom Layer w10: v1@4228.5,3408.5 4266.06,3408.5 R7.1
NetC12_2: C12.2 C20.1 R18.1 U4.4 | length 417.8
  Top Layer w10: R18.1 2611.5,3820 C12.2 2620,3795 2635,3780 2735,3780 2740.43,3774.57 C20.1 2745.43,3745 2780,3745 2795,3760 2795,3785 2837.41,3785 U4.4
NetC15_1: C15.1 R21.1 R28.2 R31.1 | length 610.3
  Top Layer w10: v1(4155,3225) 4194.57,3225 R31.1
  Bottom Layer w10: R21.1 4120,3350 4155,3315 v1(4155,3225) 4238.5,3141.5 R28.2
NetC16_2: C16.2 C23.1 R20.1 U7.1 | length 364.5
  Top Layer w10: R20.1 C23.1@2665.43,3255 ; C23.1 2675.43,3250.43 2760,3335 2780,3335 2839.18,3275.82 U7.1
NetC17_1: C17.1 R22.2 R27.1 R29.1 | length 140
  Top Layer w10: R27.1 C17.1
  Bottom Layer w10: R29.1@3565,3185 R22.2@3565,3245
  other v1: 3565,3215
NetC21_1: C21.1 R25.1 R26.2 U5.7 | length 283.7
  Top Layer w10: U5.7 3557.36,3835 3605,3835 3640.43,3870.43 C21.1 3740,3933.5 R26.2
NetC21_2: C21.2 R19.1 R25.2 U5.6 | length 479.8
  Top Layer w10: R19.1 3435,3955.43 3435,3845 3500,3780 U5.6 3610,3780 3633.5,3803.5 R25.2 C21.2
NetC22_1: C22.1 R29.2 U8.2 | length 236.3
  Top Layer w10: v1(3780,3215) U8.2@3857.64,3215
  Bottom Layer w10: R29.2@3636.06,3179.57 C22.1 3744.57,3179.57 v1(3780,3215)
NetC22_2: C22.2 R21.2 R22.1 U8.1 | length 325.7
  Top Layer w10: v1(3780,3255) 3857.64,3255 U8.1
  Bottom Layer w10: R22.1 v1(3780,3255) 3780,3346.5 R21.2
NetC23_2: C23.2 C28.1 R33.1 U7.4 | length 359.1
  Top Layer w10: R33.1@2576.5,3166.06 2593.94,3183.5 C23.2 2670,3150 2680,3140 2740,3140 ; C28.1 2740,3090.43 2740,3140 ; U7.4 2835.95,3140 2740,3140
NetC26_2: C26.2 R28.1 U8.6 | length 275.8
  Top Layer w10: U8.6 4120,3160 4145,3135 4145,3095 4165,3075 4191.5,3075 C26.2 4203.5,3070 v1(4235,3070)
  Bottom Layer w10: v1(4235,3070) R28.1@4279.57,3070
NetC29_1: C29.1 R36.1 R41.2 R44.1 | length 576.1
  Top Layer w10: v1(4160,2905) 4194.57,2905 R44.1
  Bottom Layer w10: R36.1 4135,3010 4160,2985 v1(4160,2905) 4243.5,2821.5 R41.2 R41.2@4271.5,2825
NetC31_2: C31.2 C35.1 R35.1 U10.1 | length 359.8
  Top Layer w10: R35.1 2595,2915.43 2675.43,2915.43 2760,3000 2795,3000 2795,2998.36 2839.18,2954.18 U10.1
NetC32_1: C32.1 R37.2 R40.1 R42.1 | length 154.4
  Top Layer w10: R40.1 3569.57,2864.13 C32.1@3569.57,2931.06
  Bottom Layer w10: R42.1 3569.57,2931.06 R37.2
  other v1: 3569.57,2895
NetC34_1: C34.1 R42.2 U11.2 | length 240.6
  Top Layer w10: v1(3790,2890) U11.2
  Bottom Layer w10: R42.2 3641.06,2859.57 C34.1 3759.57,2859.57 v1(3790,2890)
NetC34_2: C34.2 R36.2 R37.1 U11.1 | length 297.8
  Top Layer w10: v1(3790,2930) 3800,2940 U11.1
  Bottom Layer w10: R37.1 3716.5,2935 C34.2 3786.5,2926.5 v1(3790,2930) R36.2@3790,2996.5
NetC35_2: C35.2 C41.1 R46.1 U10.4 | length 373.5
  Top Layer w10: R46.1@2576.5,2826.06 2598.94,2848.5 C35.2 2675,2815 2830.95,2815 U10.4 ; C41.1 2740.43,2814.57
NetC38_2: C38.2 R41.1 U11.6 | length 316.5
  Top Layer w10: U11.6@4097.16,2840 U11.6 4120,2840 4145,2815 4145,2770 4155,2760 4193.5,2760 4203.5,2750 v1(4235,2750)
  Bottom Layer w10: v1(4235,2750) 4270.43,2750 R41.1 R41.1@4284.57,2745
NetC43_1: C43.1 R52.1 R57.2 R60.1 | length 587
  Top Layer w10: v1(4160,2585) R60.1@4194.57,2585
  Bottom Layer w10: R52.1 4140,2690 4160,2670 v1(4160,2585) 4243.5,2501.5 R57.2
NetC46_2: C46.2 C50.1 R51.1 U14.1 | length 363.4
  Top Layer w10: R51.1 2585,2585.43 2665.43,2585.43 2750,2670 2800,2670 2840,2630 2840,2580.82 U14.1
NetC47_1: C47.1 R53.2 R56.1 R58.1 | length 140.6
  Top Layer w10: R56.1@3570,2530 C47.1@3570,2590
  Bottom Layer w10: R53.2 3568.5,2516.5 R58.1@3570,2515
  other v1: 3570,2560
NetC49_1: C49.1 R58.2 U15.2 | length 263.3
  Top Layer w10: v1(3785,2570) U15.2
  Bottom Layer w10: R58.2 3641.93,2519.57 3759.57,2519.57 3785,2545 v1(3785,2570) ; C49.1@3715.43,2515 C49.1
NetC49_2: C49.2 R52.2 R53.1 U15.1 | length 312.5
  Top Layer w10: v1(3785,2615) 3857.64,2615 U15.1
  Bottom Layer w10: R53.1 3711.5,2595 C49.2 ; C49.2@3720,2600 3735,2615 v1(3785,2615) R52.2@3785,2688.5
NetC50_2: C50.2 C57.1 R63.1 U14.4 | length 360.5
  Top Layer w10: R63.1@2576.5,2506.06 2588.94,2518.5 C50.2 2670,2513.5 2670,2485 2780,2485 2795,2500 2835.95,2500 U14.4 ; C57.1 2740.43,2484.57
NetC53_2: C53.2 R57.1 U15.6 | length 266.5
  Top Layer w10: U15.6 4120,2520 4145,2495 4145,2455 4161.5,2438.5 C53.2 4198.5,2435 v1(4235,2435)
  Bottom Layer w10: v1(4235,2435) 4274.57,2435 R57.1
NetC58_1: C58.1 u16.4 | length 71.5
  Top Layer w10: C58.1@2285,3840 2288.24,3843.24 u16.4
NetC59_1: C59.1 R68.1 R73.2 R76.1 | length 570.6
  Top Layer w10: v1(4160,2265) 4194.57,2265 R76.1
  Bottom Layer w10: R68.1 4125,2370 4160,2335 v1(4160,2265) 4243.5,2181.5 R73.2 R73.2@4271.5,2185 ; C59.1@4140,2354.5 C59.1@4140.25,2354.75
NetC60_2: C60.2 C65.1 R67.1 U18.1 | length 343.1
  Top Layer w10: R67.1 2585,2245.43 C65.1 2665,2250 2745,2330 2795,2330 2840,2285 2840,2260.82 U18.1
NetC61_1: C61.1 R69.2 R72.1 R74.1 | length 161.1
  Top Layer w10: R72.1@3575,2215 C61.1@3575,2300
  Bottom Layer w10: R74.1@3573.5,2218.94 R69.2
  other v1: 3575,2260
NetC64_1: C64.1 R74.2 U19.2 | length 244.8
  Top Layer w10: v1(3790,2255) 3857.64,2255 U19.2
  Bottom Layer w10: R74.2 3641.06,2219.57 C64.1 3754.57,2219.57 v1(3790,2255)
NetC64_2: C64.2 R68.2 R69.1 U19.1 | length 297.8
  Top Layer w10: v1(3790,2295) 3857.64,2295 U19.1
  Bottom Layer w10: R69.1 v1(3790,2295) R68.2@3790,2356.5 ; C64.2 C64.2@3733.5,2295
NetC65_2: C65.2 C73.1 R79.1 U18.4 | length 383.6
  Top Layer w10: R79.1@2576.5,2166.06 2588.94,2178.5 C65.2 2665,2150 2680,2135 2820,2135 2840,2155 U18.4@2840,2182.41 ; C73.1 2760.43,2134.57
NetC68_2: C68.2 R73.1 U19.6 | length 263.5
  Top Layer w10: U19.6 4115,2200 4150,2165 4150,2130 4161.5,2118.5 C68.2 4198.5,2115 v1(4235,2115)
  Bottom Layer w10: v1(4235,2115) 4274.57,2115 R73.1
NetC69_2: C69.2 U20.1 | length 216.3
  Top Layer w10: C69.2 3916.5,4155 3970,4155 4020,4105 U20.1@4020,4020
NetC70_2: C70.2 R78.1 U20.10 | length 284.6
  Top Layer w10: C70.2 C70.2@4095,4108.5 ; U20.10@4145,4020 4145,4058.5 C70.2@4095,4108.5 ; R78.1@4214.57,4170 R78.1 4161.93,4175.43 C70.2@4095,4108.5
NetC72_1: C72.1 R78.2 R83.2 U20.9 | length 322.7
  Top Layer w10: U20.9@4145,4000 R83.2 4268.5,4073.07 C72.1 4296.06,4108.5 R78.2
NetC72_2: C72.2 R81.2 | length 80
  Top Layer w10: C72.2 R81.2
NetC74_1: C74.1 R82.1 U20.3 U20.4 | length 272.9
  Top Layer w10: C74.1 R82.1 3935.43,3960 4020,3960 U20.3@4020,3980
NetC75_1: C75.1 R85.1 R90.2 R93.1 | length 583.7
  Top Layer w10: v1(4165,1931.5) 4183.07,1931.5 R93.1 ; R93.1@4194.57,1915 R93.1@4199.57,1910
  Bottom Layer w10: R85.1 4120,2050 4165,2005 v1(4165,1931.5) R90.2
NetC77_2: C77.2 C83.1 R84.1 U21.1 | length 339.4
  Top Layer w10: R84.1 2665.43,1920 C83.1 2670,1923.5 C77.2 ; C77.2@2760,2006.5 2761.5,2005 2800,2005 2840,1965 2840,1940.82 U21.1
NetC78_1: C78.1 R86.2 R87.1 R91.1 | length 151.1
  Top Layer w10: R87.1@3555,1905 C78.1@3555,1980
  Bottom Layer w10: R91.1 R86.2@3554.57,1976.06
  other v1: 3555,1940
NetC82_1: C82.1 R91.2 U23.2 | length 257.7
  Top Layer w10: v1(3785,1935) 3857.64,1935 U23.2
  Bottom Layer w10: R91.2 3626.06,1904.57 C82.1 3744.57,1904.57 3775,1935 v1(3785,1935)
NetC82_2: C82.2 R85.2 R86.1 U23.1 | length 321.9
  Top Layer w10: v1(3785,1980) U23.1
  Bottom Layer w10: R86.1 3633.94,1971.5 C82.2 3718.5,1980 v1(3785,1980) 3785,2031.5 R85.2
NetC83_2: C83.2 C88.1 R95.1 U21.4 | length 374.8
  Top Layer w10: R95.1 2661.5,1840 C83.2 2670,1820 2685,1805 2805,1805 2839.18,1839.18 U21.4 ; C88.1 2760.43,1804.57
NetC84_2: C84.2 R90.1 U23.6 | length 285.1
  Top Layer w10: U23.6 4105,1880 4145,1840 4145,1795 C84.2@4190,1750 ; C84.2 4198.5,1755 v1(4230,1755)
  Bottom Layer w10: v1(4230,1755) 4274.57,1755 R90.1 R90.1@4275.43,1755
NetC89_1: C89.1 R98.1 R103.2 R106.1 | length 624
  Top Layer w10: v1(4155,1590) R106.1
  Bottom Layer w10: R98.1 4080,1750 4155,1675 v1(4155,1590) 4243.5,1501.5 R103.2 R103.2@4273.5,1500
NetC90_2: C90.2 C95.1 R97.1 U25.1 | length 368.1
  Top Layer w10: R97.1 2580,1590.43 2683.94,1590.43 2760,1666.5 C90.2 2810,1670 2835,1645 2835,1614.18 U25.1 ; C95.1 C95.1@2660,1610
NetC91_1: C91.1 R99.2 R102.1 R104.1 | length 153.3
  Top Layer w10: C91.1 3569.57,1655.87 R102.1@3569.57,1590
  Bottom Layer w10: R104.1 3569.57,1666.06 R99.2
  other v1: 3569.57,1625
NetC94_1: C94.1 R104.2 U26.2 | length 255
  Top Layer w10: v1(3785,1620) 3795,1610 U26.2
  Bottom Layer w10: R104.2@3641.06,1594.57 R104.2 3720.43,1590 C94.1 3769.57,1594.57 3785,1610 v1(3785,1620)
NetC94_2: C94.2 R98.2 R99.1 U26.1 | length 314.9
  Top Layer w10: v1(3785,1660) U26.1
  Bottom Layer w10: R99.1 3648.94,1661.5 C94.2 3726.5,1660 v1(3785,1660) R98.2@3785,1748.5
NetC95_2: C95.2 C100.1 R108.1 U25.4 | length 404.8
  Top Layer w10: R108.1 C95.2@2660,1515 ; C95.2 2669.73,1533.23 U25.4 ; C100.1 2839.18,1508.75 U25.4 ; U25.4@2840,1532.41 U25.4
NetC98_2: C98.2 R103.1 U26.6 | length 298.5
  Top Layer w10: U26.6 4110,1560 4150,1520 4150,1460 4171.5,1438.5 C98.2 4203.5,1430 v1(4240,1430)
  Bottom Layer w10: v1(4240,1430) 4270.43,1430 R103.1
NetC101_2: C101.2 C111.1 R4.2 R6.2 | length 213.1
  Top Layer w10: C111.1 R6.2
NetC102_2: C102.2 C112.1 R23.2 R27.2 | length 243.1
  Top Layer w10: C112.1 R27.2
NetC103_2: C103.2 C113.1 R38.2 R40.2 | length 243.1
  Top Layer w10: C113.1 R40.2
NetC104_2: C104.2 C114.1 R54.2 R56.2 | length 223.1
  Top Layer w10: C114.1 R56.2
NetC105_2: C105.2 C115.2 R70.2 R72.2 | length 232
  Top Layer w10: C115.2 R72.2
NetC106_2: C106.2 C116.2 R87.2 R88.2 | length 212
  Top Layer w10: C116.2 R87.2
NetC107_2: C107.2 C117.1 R100.2 R102.2 | length 243.1
  Top Layer w10: C117.1 R102.2
NetC111_2: C111.2 TP1.0 U2.7 | length 180.8
  Top Layer w10: U2.7 3202.91,3514.41 C111.2
NetC112_2: C112.2 TP2.0 U7.7 | length 164.5
  Top Layer w10: U7.7 3105.59,3194.41 TP2.0 C112.2
NetC113_2: C113.2 TP3.0 U10.7 | length 164.5
  Top Layer w10: U10.7 3174.09,2874.41 C113.2
NetC114_2: C114.2 TP4.0 U14.7 | length 192.8
  Top Layer w10: U14.7 3120.59,2554.41 3155,2520 C114.2
NetC115_1: C115.1 TP5.0 U18.7 | length 175.5
  Top Layer w10: U18.7 3185.16,2234.41 C115.1
NetC116_1: C116.1 TP6.0 U21.7 | length 175.5
  Top Layer w10: U21.7 3185.16,1914.41 C116.1
NetC117_2: C117.2 TP7.0 U25.7 | length 160.3
  Top Layer w10: U25.7 3184.09,1584.41 C117.2
NetD1_2: D1.2 L1.1 U20.6 | length 340.5
  Top Layer w10: L1.1@4130,3869.06 L1.1 ; U20.6@4145,3940 4145,3884.06 L1.1 ; v1(4190,3810) 4140.94,3859.06 L1.1
  Bottom Layer w10: v1(4190,3810) 4190,3805 4261.61,3733.39 D1.2
NetJP3_9: JP3.9 JP3.10 L2.1 | length 585.1
  Top Layer w20: L2.1 4720,3419.37 JP3.10
NetJP3_15: JP3.15 JP3.16 L3.1 | length 368.5
  Top Layer w20: L3.1 4720,2080.63 JP3.15
NetLED2_2: LED2.2 R66.1 | length 105.2
  Top Layer w20: LED2.2 R66.1
NetR12_1: R12.1 R16.2 U5.3 | length 902
  Top Layer w10: v1(3260,3785) 3342.64,3785 U5.3 U5.3@3350,3780
  Bottom Layer w10: R12.1@2528.5,3883.94 R16.2 2563.5,3785 v1(3260,3785)
NetR12_2: R12.2 Rg2.1 U4.2 | length 246.3
  Top Layer w10: v1@2775,3860 2800,3835 2838.59,3835 U4.2
  Bottom Layer w10: R12.2@2616.06,3895.43 Rg2.1 2700.43,3895 2745,3895 v1(2775,3865)
NetR13_2: R13.2 U4.7 | length 77.9
  Top Layer w10: U4.7 3097.91,3834.41 R13.2
NetR16_1: R16.1 Rg2.2 U4.3 | length 242.5
  Top Layer w10: v1(2775,3830) 2796.18,3808.82 U4.3
  Bottom Layer w10: R16.1@2603.94,3828.5 Rg2.2 v1@2773.5,3828.5
NetR19_2: R19.2 U5.1 U5.2 | length 240.7
  Top Layer w10: U5.2 3348.5,3830.87 R19.2 3347.64,3974.13 U5.1
NetRg1_1: Rg1.1 U2.2 | length 154.7
  Top Layer w10: v1(2785,3530) 2800.59,3514.41 U2.2
  Bottom Layer w10: Rg1.1@2720.43,3580 2750,3580 2785,3545 v1(2785,3530)
NetRg1_2: Rg1.2 U2.3 | length 117.7
  Top Layer w10: v1(2785,3490) U2.3@2830,3490
  Bottom Layer w10: Rg1.2 2738.5,3490 v1(2785,3490)
NetRg3_1: Rg3.1 U7.2 | length 153.1
  Top Layer w10: v1(2785,3205) 2795.59,3194.41 U7.2
  Bottom Layer w10: Rg3.1@2720,3255 2750,3255 2785,3220 v1(2785,3205)
NetRg3_2: Rg3.2 U7.3 | length 125.7
  Top Layer w10: v1(2785,3170) U7.3@2838,3170
  Bottom Layer w10: Rg3.2 2738.5,3170 v1(2785,3170)
NetRg4_1: Rg4.1 U10.2 | length 136.2
  Top Layer w10: v1(2790,2875) 2838.59,2875 U10.2
  Bottom Layer w10: Rg4.1@2720,2915 2749.57,2915.43 v1(2790,2875)
NetRg4_2: Rg4.2 U10.3 | length 122.2
  Top Layer w10: v1(2790,2845) 2793.82,2848.82 U10.3
  Bottom Layer w10: Rg4.2 2723.5,2845 v1(2790,2845)
NetRg5_1: Rg5.1 U14.2 | length 127.7
  Top Layer w10: v1(2790,2560) 2795.59,2554.41 U14.2
  Bottom Layer w10: Rg5.1 2775,2575 v1(2790,2560)
NetRg5_2: Rg5.2 U14.3 | length 126.9
  Top Layer w10: v1(2790,2530) U14.3@2838,2530
  Bottom Layer w10: Rg5.2 2768.5,2508.5 v1(2790,2530)
NetRg6_1: Rg6.1 U18.2 | length 135.2
  Top Layer w10: v1(2785,2235) 2838.59,2235 U18.2
  Bottom Layer w10: Rg6.1@2710.43,2250 2770,2250 v1(2785,2235)
NetRg6_2: Rg6.2 U18.3 | length 127.6
  Top Layer w10: v1(2785,2205) 2788.82,2208.82 U18.3
  Bottom Layer w10: Rg6.2 2768.5,2188.5 v1(2785,2205)
NetRg7_1: Rg7.1 U21.2 | length 129
  Top Layer w10: v1(2785,1915) 2838.59,1915 U21.2
  Bottom Layer w10: Rg7.1@2710.43,1915 v1(2785,1915)
NetRg7_2: Rg7.2 U21.3 | length 117.9
  Top Layer w10: v1(2785,1885) 2788.82,1888.82 U21.3
  Bottom Layer w10: 2737.98,1848.5 2748.5,1848.5 v1(2785,1885)
NetRg8_1: Rg8.1 U25.2 | length 148.1
  Top Layer w10: v1(2780,1595) 2790.59,1584.41 U25.2
  Bottom Layer w10: Rg8.1@2695.43,1595 v1(2780,1595)
NetRg8_2: Rg8.2 U25.3 | length 143
  Top Layer w10: v1(2780,1560) U25.3@2830,1560
  Bottom Layer w10: Rg8.2 2748.5,1528.5 v1(2780,1560)
REF: R26.1 TPREF1.0 TPREF2.0 | length 261.9
  Top Layer w10: TPREF2.0 TPREF2.0@3684.57,4100.43
  Top Layer w15: TPREF1.0 TPREF2.0 ; R26.1 TPREF2.0@3684.57,4100.43
SIGNAL_OUT1: C11.1 JP3.1 R11.2 TPOUT1.0 U3.7 | length 1025.8
  Top Layer w10: U3.7@4072.36,3525 U3.7 4135.43,3530 C11.1 4190,3490 4275,3575 R11.2@4280,3575 ; R11.2 4280,3580 TPOUT1.0@4327.5,3532.5 ; TPOUT1.0 4365,3490 4365,3260 4605,3020 JP3.1 ; TPOUT1.0@4330,3530 TPOUT1.0@4335,3525
SIGNAL_OUT2: C26.1 JP3.2 R31.2 TPOUT2.0 U8.7 | length 809.8
  Top Layer w10: U8.7@4089.45,3210 U8.7 4120,3210 4140,3190 4226.5,3190 R31.2 4315,3230 4380,3165 4380,3110 4570,2920 JP3.2 JP3.2@4620,2925 ; C26.1 4195,3190
SIGNAL_OUT3: C38.1 JP3.3 R44.2 TPOUT3.0 U11.7 | length 683.5
  Top Layer w10: U11.7@4089.45,2890 U11.7 4115,2890 4132.5,2872.5 4195,2872.5 ; C38.1 4195,2872.5 ; R44.2@4260,2903.5 4260,2885 4247.5,2872.5 4195,2872.5 ; R44.2 TPOUT3.0 4425,2820 JP3.3
SIGNAL_OUT4: C53.1 JP3.4 R60.2 TPOUT4.0 U15.7 | length 696.4
  Top Layer w10: U15.7 4115,2570 4135,2550 4250,2550 4265,2565 4265,2588.5 R60.2 4295,2590 4355,2650 TPOUT4.0 4405,2720 JP3.4 ; C53.1 4195,2545
SIGNAL_OUT5: C68.1 JP3.5 R76.2 TPOUT5.0 U19.7 | length 898.8
  Top Layer w10: U19.7 4115,2250 4135,2230 4240,2230 4280,2270 TPOUT5.0 4425,2320 4425,2545 4500,2620 JP3.5 ; C68.1 4195,2230
SIGNAL_OUT6: C84.1 JP3.6 R93.2 TPOUT6.0 U23.7 | length 1171
  Top Layer w10: U23.7 4105,1930 4160,1875 4245,1875 4260,1890 4260,1903.5 R93.2@4266.5,1910 ; C84.1@4190.43,1830 C84.1 4195,1875 ; R93.2 4345,1920 4460,2035 4460,2485 4495,2520 JP3.6
SIGNAL_OUT7: C98.1 JP3.7 R106.2 TPOUT7.0 U26.7 | length 1391.6
  Top Layer w10: U26.7 4100,1610 4160,1550 4250,1550 4270,1570 4270,1586.5 R106.2 TPOUT7.0 4505,1740 4505,2410 4515,2420 JP3.7 ; C98.1 4195,1550
V_BAT: BT1.1 C54.1 C80.1 R82.2 TPVBAT1.1 u16.1 u16.3 U20.5 | length 2614.9
  Top Layer w10: u16.3@2173.63,3914.57 u16.3 2119.8,3910.2 2110,3920 2110,3970 2125,3985 u16.1 ; BT1.1@3050,4220 BT1.1 BT1.1@3070,4195
  Top Layer w20: C54.1 2225,4089.57 2225,4190 2255,4220 BT1.1@3050,4220 ; u16.1 C54.1@2180,4050 ; BT1.1@3070,4195 3120,4145 3450,4145 3480,4175 3735,4175 3800,4110 3800,3988.5 R82.2 3848.5,3911.5 3924.57,3835.43 C80.1 4020,3930
pads on no net: JP3.11 JP3.14 R70.1
copper on no net: | length 22.3
  Top Layer w10: 2838,2530 2839.18,2528.82
  Bottom Layer w10: 2705.43,1840 2720,1854.57

## Polygon pours and split planes (outlines as drawn)
AGND on Top Layer (solid, remove dead copper): 2005,4050 2225,4050 2225,4230 4565,4230 4565,4065 4790,4065 4790,1540 4570,1540 4570,1310 2215,1310 2215,1525 2000,1525 2000,4055
+2.5V on Top Layer (solid, remove dead copper): 2265,3955 2465,3955 2465,4185 2255,4185 2255,3955
AGND on GND (solid, remove dead copper): 2000,4055 2225,4055 2225,4280 4565,4280 4565,4060 4795,4060 4795,1535 4570,1535 4570,1305 2215,1305 2215,1525 2000,1525
-2.5V on POWER (solid, remove dead copper): 2985,1455 2985,3775 3800,3775 3800,4280 4565,4280 4565,3860 3935,3860 3935,1470 3750,1470 3750,3600 3135,3600 3135,1455
+2.5V on POWER (solid, remove dead copper): 2000,4060 2240,4060 2240,4285 4560,4285 4560,4065 4790,4065 4790,1535 4565,1535 4565,1305 2215,1305 2215,1525 2000,1525
AGND on Bottom Layer (solid, remove dead copper): 2000,4055 2235,4055 2235,4280 4560,4280 4560,4060 4795,4060 4795,1535 4570,1535 4570,1305 2210,1305 2000,1515 2210,1305 2210,1525 2000,1525

## Silkscreen, mask and mechanical layers (free items; w line width, h text height)
Mechanical 1:
  lines w10: 1985,1285 4810,1290 4810,4300 1985,4295 1985,1285

## Text inside footprints (layer, text, board x,y; h text height)
BT1: Top Overlay "+" at 2975.51,4177.28 h45.28
JP3: Top Overlay "16" at 4700,2240 h50 r270; Top Overlay "8" at 4600,2240 h50 r270; Top Overlay "1" at 4600,3120 h50 r270; Top Overlay "9" at 4700,3120 h50 r270